# EAGLE board BulkBoard3 (EAGLE 8.5.1), part 1 of 2
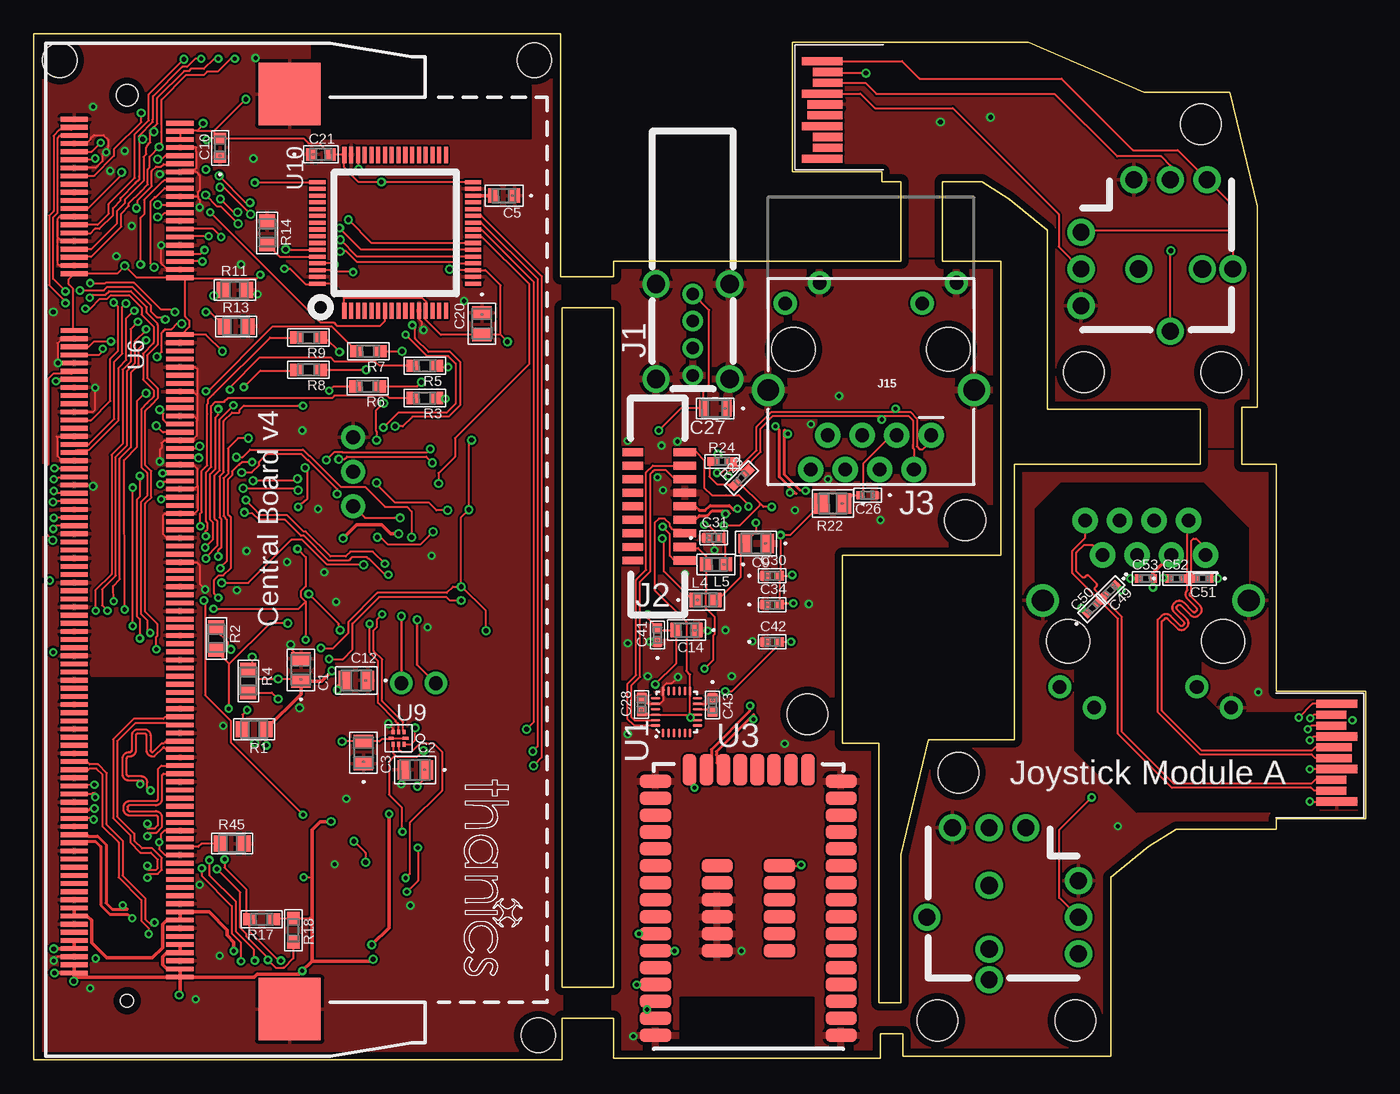
[diagram p0: board, top side]
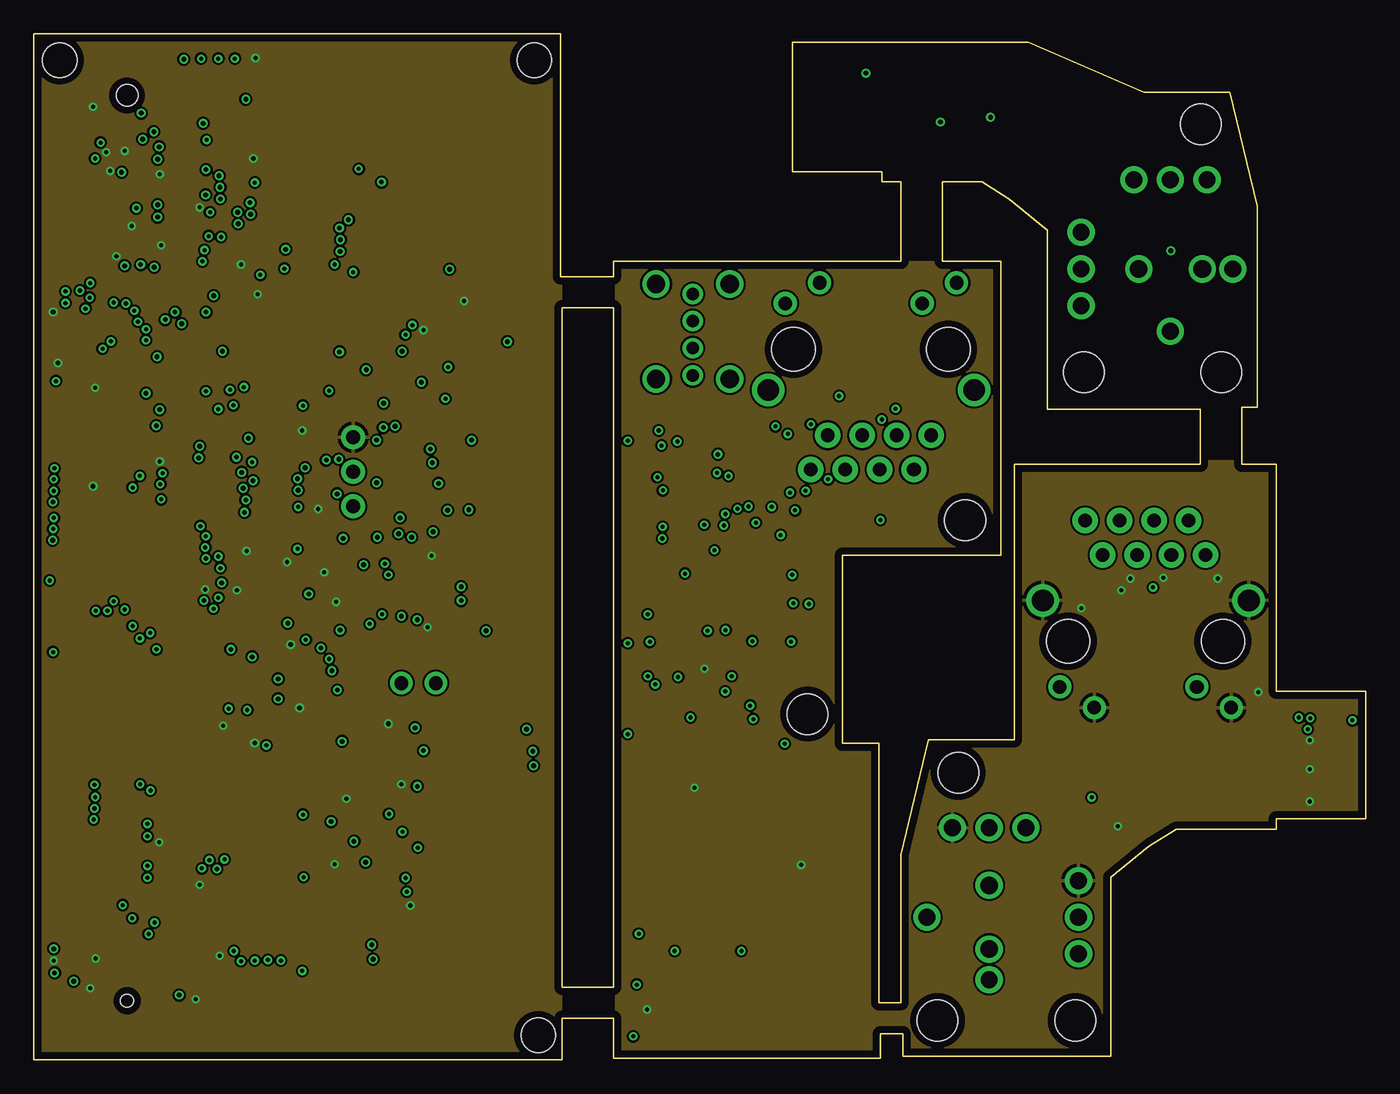
[diagram p1: board, inner layer Route2]
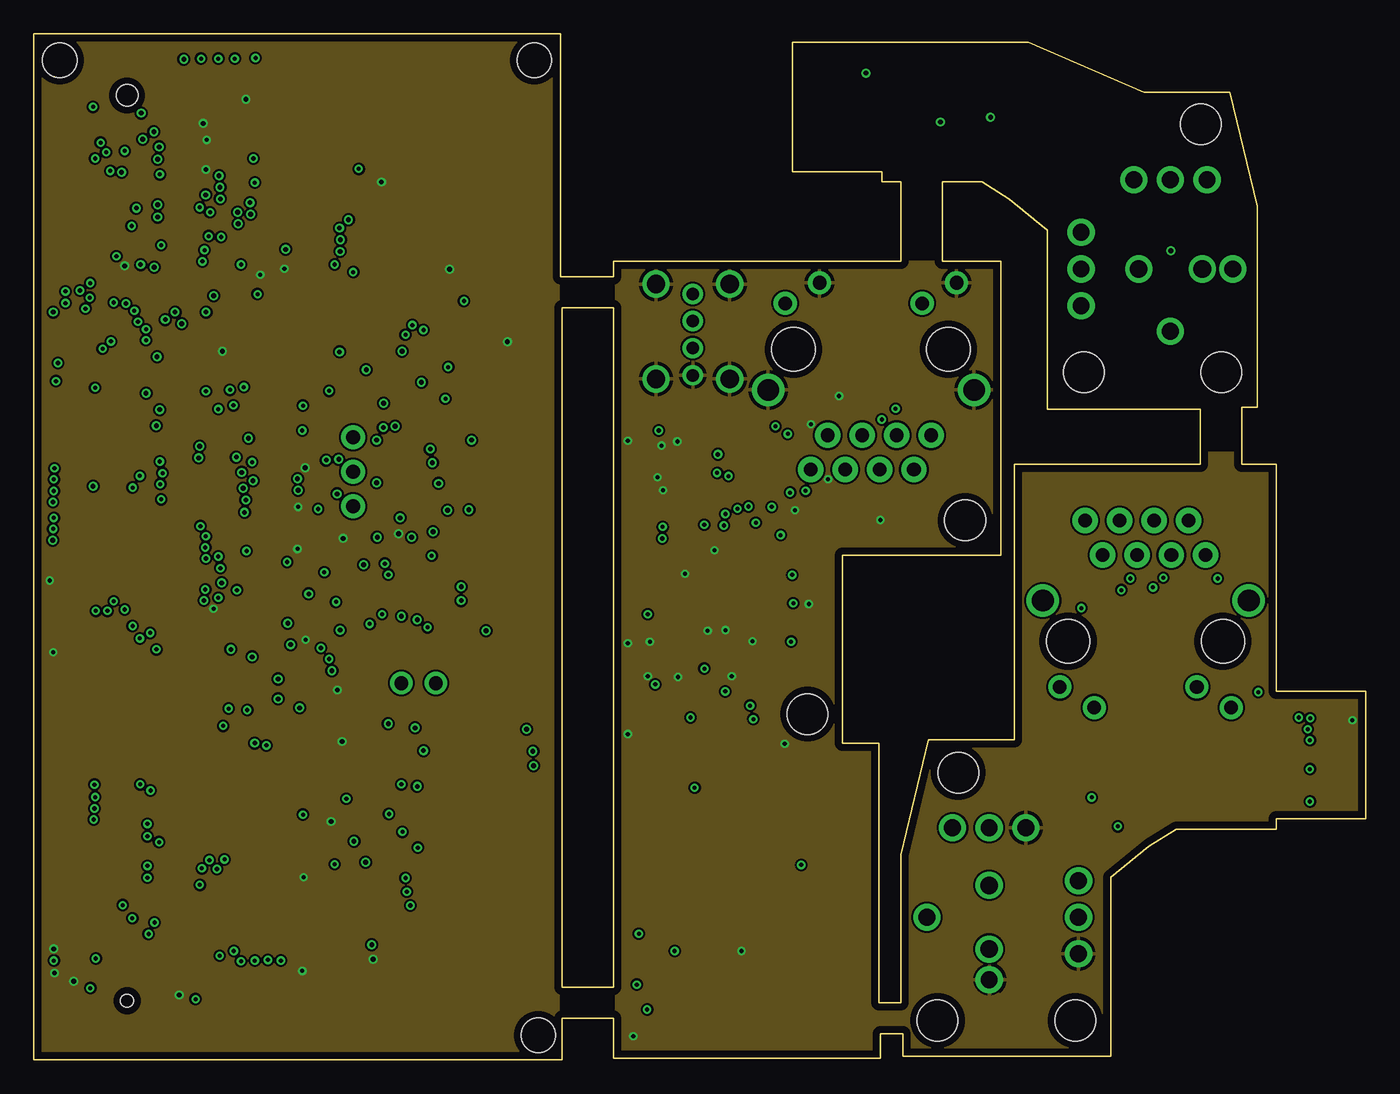
[diagram p2: board, inner layer Route15]
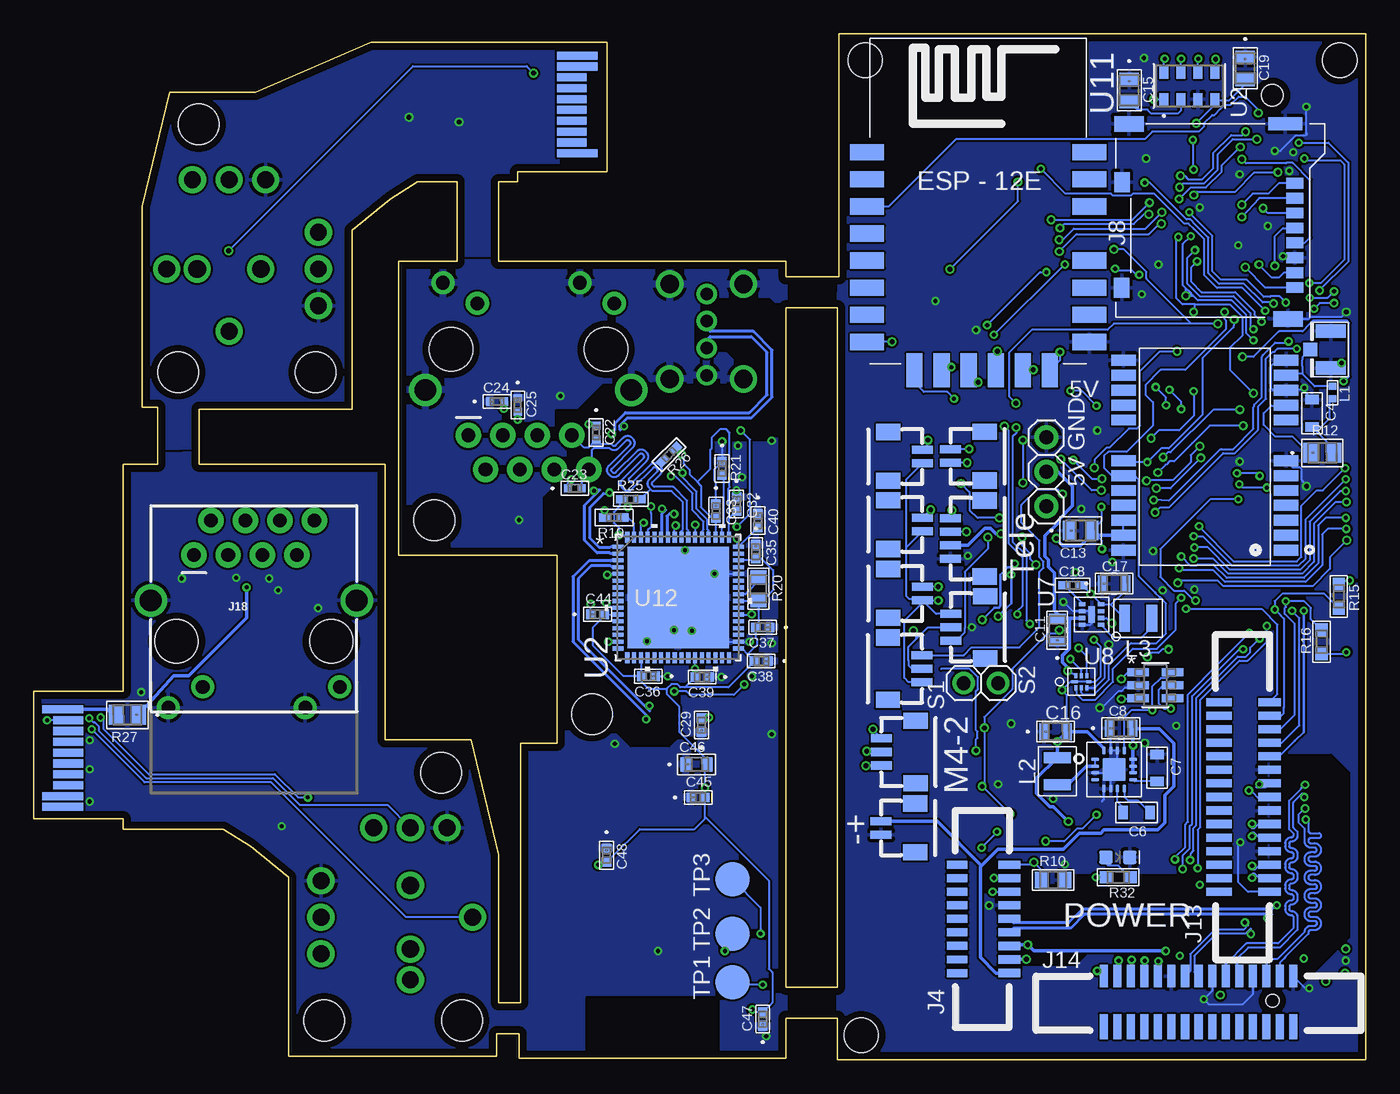
[diagram p3: board, bottom side, seen from below]

Size 98.3 x 75.69 mm. Coordinates in mm from the lower left corner, seen from the top.
Outline: 0,0 38.99,0 38.99,3.05 42.8,3.05 42.8,0.13 62.48,0.13 62.48,1.91 64.14,1.91 64.14,0.25 79.5,0.25 79.5,13.46 82.3,15.75 84.33,17.02 91.69,17.02 91.69,17.78 98.3,17.78 98.3,27.18 91.69,27.18 91.69,43.94 89.15,43.94 89.15,48.13 90.3,48.13 90.3,62.99 88.27,71.37 81.92,71.37 73.41,75.06 56.01,75.06 56.01,65.53 62.61,65.53 62.61,64.77 64.01,64.77 64.01,58.93 42.8,58.93 42.8,57.78 38.86,57.78 38.86,75.69 0,75.69 0,0
Outline: 86.11,48.01 86.11,43.94 72.39,43.94 72.39,23.62 66.04,23.62 64.01,15.11 64.01,4.19 62.36,4.19 62.36,23.37 59.69,23.37 59.69,37.21 71.37,37.21 71.37,58.93 67.06,58.93 67.06,64.77 69.98,64.77 72.01,63.5 74.8,61.21 74.8,48.01 86.11,48.01
Outline: 38.99,5.33 42.8,5.33 42.8,55.5 38.99,55.5 38.99,5.33
Copper layers (1*2*15*16): Top 0.035mm / dielectric 0.2mm / Route2 0.035mm / dielectric 1.2mm / Route15 0.035mm / dielectric 0.2mm / Bottom 0.035mm
Design rules "Elecrow_4-layer_PCB_eagle_rule": minimum track width 6mil, minimum drill 12mil, track to track 6mil, track to pad 6mil, pad to pad 6mil, via to via 8mil, smd to smd 0mil, copper to edge 20mil, drill to drill 10mil, minimum pad ring 6mil, minimum via ring 6mil, stop-mask expansion 0mil, vias tented up to drill 100mil, thermal gap 10mil
Holes 2.54 mm at 37.24,1.8 1.91,73.74 36.93,73.74
Holes 3 mm at 68.74,39.8 57.11,25.5 68.22,21.18 76.86,2.9 66.7,2.9 86.13,69.01 77.5,50.72 87.66,50.72
tRestrict: area 47.7,0.2 to 57.5,4.6
bRestrict: area 47.7,0.2 to 57.5,4.6

## Footprints (pad centres in the part's own frame; a part is rotated, then mirrored left to right if it is on the bottom)
0805 = smd 0.965 x 1.448: 1 -0.826,0; 2 0.826,0
0603_CAPACITOR = smd 0.701 x 1.001: 1 -1.001,0; 2 1.001,0
0603-M = smd 0.813 x 1.067: 1 -0.775,0; 2 0.775,0
G-21 = smd 0.711 x 1.245: 1 -0.851,0; 2 0.851,0
YAG_CC0805 = smd 0.965 x 1.448: 1 -0.826,0; 2 0.826,0
G-188-M = smd 0.813 x 0.914: 1 -0.699,0; 2 0.699,0
CC0402N-M = smd 0.864 x 0.61: 1 -0.635,0; 2 0.635,0
G-155-M = smd 0.559 x 0.61: 1 -0.521,0; 2 0.521,0
0402-M = smd 0.711 x 0.711: 1 -0.508,0; 2 0.508,0
LED-0603 = smd 1 x 1: A -0.877,0; C 0.877,0
JST_SH_2POS = smd 0.6 x 1.55: 1 -1.5,0; 2 -0.5,0 | smd 1.2 x 1.8: P$5 -2.8,2.525; P$6 0.8,2.525
JST_SH_4POS = smd 0.6 x 1.55: 1 -1.5,0; 2 -0.5,0; 3 0.5,0; 4 1.5,0 | smd 1.2 x 1.8: P$5 -2.8,2.525; P$6 2.8,2.525
9POS_FFC_CONNECTOR = smd 0.6 x 1.65: 1 -7.27,-2; 2 -6.27,-2; 3 -5.27,-2; 4 -4.27,-2; 5 -3.27,-2; 6 -2.27,-2; 7 -1.27,-2; 8 -0.27,-2; 9 0.73,-2 | smd 0.584 x 1.524: P$16 -7.27,1.852; P$17 -6.27,1.852; P$18 -5.27,1.852; P$19 -4.27,1.852; P$20 -3.27,1.852; P$21 -2.27,1.852; P$22 -1.27,1.852; P$23 -0.27,1.852; P$24 0.73,1.852
U.FL = smd 2.2 x 1: P$1 0,1.375; P$2 0,-1.375 | smd 1.05 x 1: P$3 1.525,0
MICROSD = smd 0.8 x 1.24: 1 -4.4,0; 2 -3.3,0; 3 -2.2,0; 4 -1.1,0; 5 0,0; 6 1.1,0; 7 2.2,0; 8 3.3,0 | smd 0.95 x 2.5: 9 -8.775,-0.7 | smd 1.15 x 2.2: 10 5.615,-0.5; 11 -8.775,-12.23 | smd 1.5 x 1.15: 12 -4.47,-12.755; 13 3.31,-12.775
JST_SH_3POS = smd 0.6 x 1.55: 1 -1.61,-0.08; 2 -0.61,-0.08; 3 0.39,-0.08 | smd 1.2 x 1.8: P$5 -2.91,2.445; P$6 1.69,2.445
15POS_FFC_CONNECTOR = smd 0.6 x 1.65: 1 -6,-2; 2 -5,-2; 3 -4,-2; 4 -3,-2; 5 -2,-2; 6 -1,-2; 7 0,-2; 8 1,-2; 9 2,-2; 10 3,-2; 11 4,-2; 12 5,-2; 13 6,-2; 14 7,-2; 15 8,-2 | smd 0.6 x 1.85: P$16 -6,1.725; P$17 -5,1.725; P$18 -4,1.725; P$19 -3,1.725; P$20 -2,1.725; P$21 -1,1.725; P$22 0,1.725; P$23 1,1.725; P$24 2,1.725; P$25 3,1.725; P$26 4,1.725; P$27 5,1.725; P$28 6,1.725; P$29 7,1.725; P$30 8,1.725
MAGJACK = drill 1 pad 1.88: 1 -4.445,6.015; 2 -3.175,8.555; 3 -1.905,6.015; 4 -0.635,8.555; 5 0.635,6.015; 6 1.905,8.555; 7 3.175,6.015; 8 4.445,8.555 | drill 1 pad 1.7: 9 -3.785,-3.715; 10 -6.325,-5.235; 11 6.325,-3.715; 12 3.785,-5.235 | drill 1.6 pad 2.184: M1 -7.62,2.67; M2 7.58,2.67 | hole 3.2: -5.715,-0.335; 5.715,-0.335
USB_A_VERTICAL = drill 0.92 pad 1.5: 1 -3,0; 2 -1,0; 3 1,0; 4 3,0 | drill 1.35 pad 2: P$5 -3.73,-2.72; P$6 -3.73,2.72; P$7 3.27,2.72; P$8 3.27,-2.72
1X02 = drill 1.016 pad 1.651: 1 -1.27,0; 2 1.27,0
1X03 = drill 1.016 pad 1.778: 1 -2.54,0; 2 0,0; 3 2.54,0
0402_INDUCTOR = smd 0.525 x 0.55: P$1 -0.463,0; P$2 0.463,0
1008_INDUCTOR = smd 0.8 x 2: P$1 -1,0; P$2 1,0
IND_BLM18_0603-M = smd 0.914 x 1.041: 1 -0.724,0; 2 0.724,0
RC0805N = smd 1.006 x 1.2: 1 -0.853,0; 2 0.853,0
RC0603N-M = smd 0.965 x 0.914: 1 -0.876,0; 2 0.876,0
STA_RNCP0805-M = smd 1.118 x 1.499: 1 -0.826,0; 2 0.826,0
RC0402N-M = smd 0.864 x 0.61: 1 -0.66,0; 2 0.66,0
YAG_R0402-M = smd 0.66 x 0.66: 1 -0.508,0; 2 0.508,0
B2,54 = smd 2.54 x 2.54: TP 0,0
QFN40P300X300X105-25N = smd 0.7 x 0.2: 1 -1.55,1; 2 -1.55,0.6; 3 -1.55,0.2; 4 -1.55,-0.2; 5 -1.55,-0.6; 6 -1.55,-1; 13 1.55,-1; 14 1.55,-0.6; 15 1.55,-0.2; 16 1.55,0.2; 17 1.55,0.6; 18 1.55,1 | smd 0.2 x 0.7: 7 -1,-1.55; 8 -0.6,-1.55; 9 -0.2,-1.55; 10 0.2,-1.55; 11 0.6,-1.55; 12 1,-1.55; 19 1,1.55; 20 0.6,1.55; 21 0.2,1.55; 22 -0.2,1.55; 23 -0.6,1.55; 24 -1,1.55
LGA8-M = smd 0.94 x 0.66: 1 -1.003,1.875; 2 -1.003,0.625; 3 -1.003,-0.625; 4 -1.003,-1.875; 5 1.003,-1.875; 6 1.003,-0.625; 7 1.003,0.625; 8 1.003,1.875
MF06A-M = smd 1.575 x 0.584: 1 -1.27,0.953; 2 -1.27,0; 3 -1.27,-0.953; 4 1.27,-0.953; 5 1.27,0; 6 1.27,0.953
NEO-M8 = smd 1.8 x 0.8: 1 6.4,-7.4; 2 6.4,-6.3; 3 6.4,-5.2; 4 6.4,-4.1; 5 6.4,-3; 6 6.4,-1.9; 7 6.4,-0.8; 8 6.4,2.2; 9 6.4,3.3; 10 6.4,4.4; 11 6.4,5.5; 12 6.4,6.6; 13 -5.6,6.6; 14 -5.6,5.5; 15 -5.6,4.4; 16 -5.6,3.3; 17 -5.6,2.2; 18 -5.6,-0.8; 19 -5.6,-1.9; 20 -5.6,-3; 21 -5.6,-4.1; 22 -5.6,-5.2; 23 -5.6,-6.3; 24 -5.6,-7.4
VQFN16 = smd 0.6 x 0.24: 1 -1.4,0.75; 2 -1.4,0.25; 3 -1.4,-0.25; 4 -1.4,-0.75; 9 1.4,-0.75; 10 1.4,-0.25; 11 1.4,0.25; 12 1.4,0.75 | smd 0.24 x 0.6: 5 -0.75,-1.4; 6 -0.25,-1.4; 7 0.25,-1.4; 8 0.75,-1.4; 13 0.75,1.4; 14 0.25,1.4; 15 -0.25,1.4; 16 -0.75,1.4 | smd 1.68 x 1.68: 17 0,0
SO-DIMM = smd 0.35 x 2: 1 -26.4,-3.9; 2 -26.1,3.9; 3 -25.8,-3.9; 4 -25.5,3.9; 5 -25.2,-3.9; 6 -24.9,3.9; 7 -24.6,-3.9; 8 -24.3,3.9; 9 -24,-3.9; 10 -23.7,3.9; 11 -23.4,-3.9; 12 -23.1,3.9; 13 -22.8,-3.9; 14 -22.5,3.9; 15 -22.2,-3.9; 16 -21.9,3.9; 17 -21.6,-3.9; 18 -21.3,3.9; 19 -21,-3.9; 20 -20.7,3.9; 21 -20.4,-3.9; 22 -20.1,3.9; 23 -19.8,-3.9; 24 -19.5,3.9; 25 -19.2,-3.9; 26 -18.9,3.9; 27 -18.6,-3.9; 28 -18.3,3.9; 29 -18,-3.9; 30 -17.7,3.9; 31 -17.4,-3.9; 32 -17.1,3.9; 33 -16.8,-3.9; 34 -16.5,3.9; 35 -16.2,-3.9; 36 -15.9,3.9; 37 -15.6,-3.9; 38 -15.3,3.9; 39 -15,-3.9; 40 -14.7,3.9; 41 -10.8,-3.9; 42 -10.5,3.9; 43 -10.2,-3.9; 44 -9.9,3.9; 45 -9.6,-3.9; 46 -9.3,3.9; 47 -9,-3.9; 48 -8.7,3.9; 49 -8.4,-3.9; 50 -8.1,3.9; 51 -7.8,-3.9; 52 -7.5,3.9; 53 -7.2,-3.9; 54 -6.9,3.9; 55 -6.6,-3.9; 56 -6.3,3.9; 57 -6,-3.9; 58 -5.7,3.9; 59 -5.4,-3.9; 60 -5.1,3.9; 61 -4.8,-3.9; 62 -4.5,3.9; 63 -4.2,-3.9; 64 -3.9,3.9; 65 -3.6,-3.9; 66 -3.3,3.9; 67 -3,-3.9; 68 -2.7,3.9; 69 -2.4,-3.9; 70 -2.1,3.9; 71 -1.8,-3.9; 72 -1.5,3.9; 73 -1.2,-3.9; 74 -0.9,3.9; 75 -0.6,-3.9; 76 -0.3,3.9; 77 0,-3.9; 78 0.3,3.9; 79 0.6,-3.9; 80 0.9,3.9; 81 1.2,-3.9; 82 1.5,3.9; 83 1.8,-3.9; 84 2.1,3.9; 85 2.4,-3.9; 86 2.7,3.9; 87 3,-3.9; 88 3.3,3.9; 89 3.6,-3.9; 90 3.9,3.9; 91 4.2,-3.9; 92 4.5,3.9; 93 4.8,-3.9; 94 5.1,3.9; 95 5.4,-3.9; 96 5.7,3.9; 97 6,-3.9; 98 6.3,3.9; 99 6.6,-3.9; 100 6.9,3.9; 101 7.2,-3.9; 102 7.5,3.9; 103 7.8,-3.9; 104 8.1,3.9; 105 8.4,-3.9; 106 8.7,3.9; 107 9,-3.9; 108 9.3,3.9; 109 9.6,-3.9; 110 9.9,3.9; 111 10.2,-3.9; 112 10.5,3.9; 113 10.8,-3.9; 114 11.1,3.9; 115 11.4,-3.9; 116 11.7,3.9; 117 12,-3.9; 118 12.3,3.9; 119 12.6,-3.9; 120 12.9,3.9; 121 13.2,-3.9; 122 13.5,3.9; 123 13.8,-3.9; 124 14.1,3.9; 125 14.4,-3.9; 126 14.7,3.9; 127 15,-3.9; 128 15.3,3.9; 129 15.6,-3.9; 130 15.9,3.9; 131 16.2,-3.9; 132 16.5,3.9; 133 16.8,-3.9; 134 17.1,3.9; 135 17.4,-3.9; 136 17.7,3.9; 137 18,-3.9; 138 18.3,3.9; 139 18.6,-3.9; 140 18.9,3.9; 141 19.2,-3.9; 142 19.5,3.9; 143 19.8,-3.9; 144 20.1,3.9; 145 20.4,-3.9; 146 20.7,3.9; 147 21,-3.9; 148 21.3,3.9; 149 21.6,-3.9; 150 21.9,3.9; 151 22.2,-3.9; 152 22.5,3.9; 153 22.8,-3.9; 154 23.1,3.9; 155 23.4,-3.9; 156 23.7,3.9; 157 24,-3.9; 158 24.3,3.9; 159 24.6,-3.9; 160 24.9,3.9; 161 25.2,-3.9; 162 25.5,3.9; 163 25.8,-3.9; 164 26.1,3.9; 165 26.4,-3.9; 166 26.7,3.9; 167 27,-3.9; 168 27.3,3.9; 169 27.6,-3.9; 170 27.9,3.9; 171 28.2,-3.9; 172 28.5,3.9; 173 28.8,-3.9; 174 29.1,3.9; 175 29.4,-3.9; 176 29.7,3.9; 177 30,-3.9; 178 30.3,3.9; 179 30.6,-3.9; 180 30.9,3.9; 181 31.2,-3.9; 182 31.5,3.9; 183 31.8,-3.9; 184 32.1,3.9; 185 32.4,-3.9; 186 32.7,3.9; 187 33,-3.9; 188 33.3,3.9; 189 33.6,-3.9; 190 33.9,3.9; 191 34.2,-3.9; 192 34.5,3.9; 193 34.8,-3.9; 194 35.1,3.9; 195 35.4,-3.9; 196 35.7,3.9; 197 36,-3.9; 198 36.3,3.9; 199 36.6,-3.9; 200 36.9,3.9 | smd 4.6 x 4.6: G1 -28.254,12; G2 39.27,12 | hole 1.6: -28.15,0 | hole 0.965: 38.65,0
MLF(ML)_8PIN = smd 0.5 x 0.3: 1 -0.7,0.75; 2 -0.7,0.25; 3 -0.7,-0.25; 4 -0.7,-0.75; 5 0.7,-0.75; 6 0.7,-0.25; 7 0.7,0.25; 8 0.7,0.75 | smd 0.5 x 1.2: EP 0,0
8-UMLP = smd 0.45 x 0.22: 1 -0.5,0 | smd 0.22 x 0.35: 2 -0.4,-0.45; 3 0,-0.45; 4 0.4,-0.45; 6 0.4,0.45; 7 0,0.45; 8 -0.4,0.45 | smd 0.35 x 0.22: 5 0.55,0
LQFP64 = smd 1.2 x 0.3: 1 -5.75,3.75; 2 -5.75,3.25; 3 -5.75,2.75; 4 -5.75,2.25; 5 -5.75,1.75; 6 -5.75,1.25; 7 -5.75,0.75; 8 -5.75,0.25; 9 -5.75,-0.25; 10 -5.75,-0.75; 11 -5.75,-1.25; 12 -5.75,-1.75; 13 -5.75,-2.25; 14 -5.75,-2.75; 15 -5.75,-3.25; 16 -5.75,-3.75; 33 5.75,-3.75; 34 5.75,-3.25; 35 5.75,-2.75; 36 5.75,-2.25; 37 5.75,-1.75; 38 5.75,-1.25; 39 5.75,-0.75; 40 5.75,-0.25; 41 5.75,0.25; 42 5.75,0.75; 43 5.75,1.25; 44 5.75,1.75; 45 5.75,2.25; 46 5.75,2.75; 47 5.75,3.25; 48 5.75,3.75 | smd 0.3 x 1.2: 17 -3.75,-5.75; 18 -3.25,-5.75; 19 -2.75,-5.75; 20 -2.25,-5.75; 21 -1.75,-5.75; 22 -1.25,-5.75; 23 -0.75,-5.75; 24 -0.25,-5.75; 25 0.25,-5.75; 26 0.75,-5.75; 27 1.25,-5.75; 28 1.75,-5.75; 29 2.25,-5.75; 30 2.75,-5.75; 31 3.25,-5.75; 32 3.75,-5.75; 49 3.75,5.75; 50 3.25,5.75; 51 2.75,5.75; 52 2.25,5.75; 53 1.75,5.75; 54 1.25,5.75; 55 0.75,5.75; 56 0.25,5.75; 57 -0.25,5.75; 58 -0.75,5.75; 59 -1.25,5.75; 60 -1.75,5.75; 61 -2.25,5.75; 62 -2.75,5.75; 63 -3.25,5.75; 64 -3.75,5.75
ESP12E-SMD = smd 2.5 x 1.2: ADC -8.3,3.8; CH_PD -8.3,1.8; GND 8.1,-8.2; GPIO0 8.1,-2.2; GPIO2 8.1,-4.2; GPIO5 8.1,1.8; GPIO12 -8.3,-4.2; GPIO13 -8.3,-6.2; GPIO14 -8.3,-2.2; GPIO15 8.1,-6.2; GPIO16 -8.3,-0.2; RESET -8.3,5.8; RXD0 8.1,3.8; TXD0 8.1,5.8; VCC -8.3,-8.2 | smd 1.2 x 2.5: CS0 -4.8,-10.3; GPIO9 -0.8,-10.3; GPIO10 1.2,-10.3; MISO -2.8,-10.3; MOSI 3.2,-10.3; SCLK 5.2,-10.3
QFN64_9X9MC-M = smd 0.813 x 0.305: 1 -4.445,3.75; 2 -4.445,3.25; 3 -4.445,2.75; 4 -4.445,2.25; 5 -4.445,1.75; 6 -4.445,1.25; 7 -4.445,0.75; 8 -4.445,0.25; 9 -4.445,-0.25; 10 -4.445,-0.75; 11 -4.445,-1.25; 12 -4.445,-1.75; 13 -4.445,-2.25; 14 -4.445,-2.75; 15 -4.445,-3.25; 16 -4.445,-3.75; 33 4.445,-3.75; 34 4.445,-3.25; 35 4.445,-2.75; 36 4.445,-2.25; 37 4.445,-1.75; 38 4.445,-1.25; 39 4.445,-0.75; 40 4.445,-0.25; 41 4.445,0.25; 42 4.445,0.75; 43 4.445,1.25; 44 4.445,1.75; 45 4.445,2.25; 46 4.445,2.75; 47 4.445,3.25; 48 4.445,3.75 | smd 0.305 x 0.813: 17 -3.75,-4.445; 18 -3.25,-4.445; 19 -2.75,-4.445; 20 -2.25,-4.445; 21 -1.75,-4.445; 22 -1.25,-4.445; 23 -0.75,-4.445; 24 -0.25,-4.445; 25 0.25,-4.445; 26 0.75,-4.445; 27 1.25,-4.445; 28 1.75,-4.445; 29 2.25,-4.445; 30 2.75,-4.445; 31 3.25,-4.445; 32 3.75,-4.445; 49 3.75,4.445; 50 3.25,4.445; 51 2.75,4.445; 52 2.25,4.445; 53 1.75,4.445; 54 1.25,4.445; 55 0.75,4.445; 56 0.25,4.445; 57 -0.25,4.445; 58 -0.75,4.445; 59 -1.25,4.445; 60 -1.75,4.445; 61 -2.25,4.445; 62 -2.75,4.445; 63 -3.25,4.445; 64 -3.75,4.445 | smd 7.493 x 7.493: 65 0,0
WGM110A = smd 2.3 x 1: 1 -6.85,0; 2 -6.85,-1.25; 3 -6.85,-2.5; 4 -6.85,-3.75; 5 -6.85,-5; 6 -6.85,-6.25; 7 -6.85,-7.5; 8 -6.85,-8.75; 9 -6.85,-10; 10 -6.85,-11.25; 11 -6.85,-12.5; 12 -6.85,-13.75; 13 -6.85,-15; 14 -6.85,-16.25; 15 -6.85,-17.5; 16 -6.85,-18.75; 25 6.85,-18.75; 26 6.85,-17.5; 27 6.85,-16.25; 28 6.85,-15; 29 6.85,-13.75; 30 6.85,-12.5; 31 6.85,-11.25; 32 6.85,-10; 33 6.85,-8.75; 34 6.85,-7.5; 35 6.85,-6.25; 36 6.85,-5; 37 6.85,-3.75; 38 6.85,-2.5; 39 6.85,-1.25; 40 6.85,0; 41 -2.3,-6.25; 42 2.3,-6.25; 43 -2.3,-7.5; 44 2.3,-7.5; 45 -2.3,-8.75; 46 2.3,-8.75; 47 -2.3,-10; 48 2.3,-10; 49 -2.3,-11.25; 50 2.3,-11.25; 51 -2.3,-12.5; 52 2.3,-12.5 | smd 1 x 2.3: 17 -4.4,-19.6; 18 -3.15,-19.6; 19 -1.9,-19.6; 20 -0.65,-19.6; 21 0.6,-19.6; 22 1.85,-19.6; 23 3.1,-19.6; 24 4.35,-19.6
JOYSTICK = drill 1.25 pad 2: 1 -6.6,2.7; 1' -2.7,-6.6; 2 -6.6,0; 2' 0,-6.6; 3 -6.6,-2.7; 3' 2.7,-6.6; A 0,4.6; B 4.6,0 | drill 1.3 pad 2: P$9 0,2.35; P$10 0,-2.35
EDGE_CONNECTOR_20POS_CONTACTS = smd 0.6 x 3 bottom: 1 -3.4,0; 9 3,0; 10 3.8,0 | smd 0.6 x 2.2 bottom: 2 -2.6,-0.4; 3 -1.8,-0.4; 4 -1,-0.4; 5 -0.2,-0.4; 6 0.6,-0.4; 7 1.4,-0.4; 8 2.2,-0.4 | smd 0.6 x 3: 11 3.4,0; 14 1,0; 17 -1.4,0; 20 -3.8,0 | smd 0.6 x 2.2: 12 2.6,-0.4; 13 1.8,-0.4; 18 -2.2,-0.4; 19 -3,-0.4 | smd 0.6 x 2.6: 15 0.2,-0.2; 16 -0.6,-0.2

## Placement (x,y rotation side)
C1  0.1uF  [0805]  19.71,28.75 90 top
C2  0.1uF  [0805]  28.14,21.39 180 top
C3  0.1uF  [0805]  24.33,22.66 90 top
C4  10nF  [0603_CAPACITOR]  3.96,47.7 270 bottom
C5  4.7uF  [0603-M]  34.7,63.75 180 top
C6  10nF  [0603_CAPACITOR]  16.92,18.24 180 bottom
C7  10nF  [0603_CAPACITOR]  15.39,21.54 270 bottom
C8  10uF  [G-21]  18.06,24.46 0 bottom
C9  1uF  [YAG_CC0805]  53.3,38.09 180 top
C10  2.2uF  [G-188-M]  13.74,67.28 90 top
C11  10uF  [G-21]  22.76,31.7 90 bottom
C12  0.1uF  [0805]  23.8,27.99 180 top
C13  0.1uF  [0805]  21.03,39.04 0 bottom
C14  4.7uF  [0603-M]  48.16,31.7 180 top
C15  1uF  [YAG_CC0805]  17.45,71.53 270 bottom
C16  22uF  [G-21]  22.89,24.21 0 bottom
C17  10uF  [G-21]  18.57,35.13 0 bottom
C18  560pF  [CC0402N-M]  21.62,35 0 bottom
C19  1uF  [YAG_CC0805]  8.89,73.15 270 bottom
C20  0.1uF  [0805]  33.07,54.31 270 top
C21  2.2uF  [G-188-M]  21.18,66.8 0 top
C22  16pF  [G-155-M]  56.79,46.28 270 bottom
C23  16pF  [G-155-M]  58.37,42.16 0 bottom
C24  16pF  [G-155-M]  64.11,48.56 0 bottom
C25  16pF  [G-155-M]  62.59,48.31 270 bottom
C26  22nF  [G-155-M]  61.53,41.66 180 top
C27  22uF  [G-21]  50.29,48.06 180 top
C28  0.1uF  [0402-M]  44.86,26.21 90 top
C29  0.1uF  [0402-M]  49.02,24.69 90 bottom
C30  0.1uF  [0402-M]  54.51,35.71 0 top
C31  0.1uF  [0402-M]  50.19,38.51 0 top
C32  0.1uF  [0402-M]  46.43,41 270 bottom
C33  0.1uF  [0402-M]  47.96,40.49 270 bottom
C34  0.1uF  [0402-M]  54.51,33.58 0 top
C35  0.1uF  [0402-M]  45.01,37.49 270 bottom
C36  0.1uF  [0402-M]  52.93,28.3 180 bottom
C37  0.1uF  [0402-M]  44.5,31.9 180 bottom
C38  0.1uF  [0402-M]  44.6,29.41 180 bottom
C39  0.1uF  [0402-M]  48.97,28.24 180 bottom
C40  0.1uF  [0402-M]  44.86,39.78 270 bottom
C41  0.1uF  [0402-M]  46.02,31.34 90 top
C42  0.1uF  [0402-M]  54.51,30.84 0 top
C43  0.1uF  [0402-M]  50.09,26.16 270 top
C44  0.1uF  [0402-M]  56.69,32.87 0 bottom
C45  0.1uF  [0402-M]  49.28,19.35 0 bottom
C46  4.7uF  [0603-M]  49.38,21.79 0 bottom
C47  0.1uF  [0402-M]  44.5,3 90 bottom
C48  0.1uF  [0402-M]  56.03,15.09 270 bottom
C49  16pF  [G-155-M]  79.45,34.65 225 top
C50  16pF  [G-155-M]  78.13,33.32 45 top
C51  16pF  [G-155-M]  86.26,35.51 180 top
C52  16pF  [G-155-M]  84.33,35.51 0 top
C53  22nF  [G-155-M]  82.08,35.51 0 top
D1  GREEN  [LED-0603]  18.29,14.94 0 bottom
J1  [JST_SH_2POS]  32.72,45.52 90 bottom
J2  [JST_SH_2POS]  32.72,40.49 90 bottom
J3  [JST_SH_4POS]  30.63,38.46 270 bottom
J4  [9POS_FFC_CONNECTOR]  28.3,13.67 90 bottom
J5  U.FL  [U.FL]  2.57,52.4 180 bottom
J6  [JST_SH_2POS]  35.76,16.1 270 bottom
J7  [JST_SH_2POS]  32.72,35.41 90 bottom
J8  MICROSD  [MICROSD]  5.23,60.27 270 bottom
J9  [JST_SH_2POS]  30.63,43.54 270 bottom
J10  [JST_SH_3POS]  30.53,31.29 270 bottom
J11  [JST_SH_3POS]  32.82,29.46 90 bottom
J12  [JST_SH_3POS]  35.66,22.1 270 bottom
J13  [15POS_FFC_CONNECTOR]  9.09,18.39 90 bottom
J14  [15POS_FFC_CONNECTOR]  11.33,4.17 180 bottom
J15  MAGJACK  [MAGJACK]  61.78,52.09 180 top
J16  [USB_A_VERTICAL]  48.64,53.5 270 top
J17  [9POS_FFC_CONNECTOR]  46.05,44.1 90 top
J18  MAGJACK  [MAGJACK]  82.05,31.22 0 bottom
JP1  [1X02]  28.4,27.79 0 bottom
JP2  [1X03]  23.57,43.38 90 bottom
L1  27 nH  [0402_INDUCTOR]  2.44,49.23 270 bottom
L2  470nH  [1008_INDUCTOR]  22.76,21.29 90 bottom
L3  470nH  [1008_INDUCTOR]  16.79,32.59 180 bottom
L4  FB  [IND_BLM18_0603-M]  49.57,33.92 0 top
L5  FB  [IND_BLM18_0603-M]  50.34,36.55 180 top
R1  10k  [RC0805N]  16.26,24.38 180 top
R2  10k  [RC0805N]  13.46,31.09 270 top
R3  20R  [RC0603N-M]  28.85,48.82 180 top
R4  10k  [RC0805N]  15.82,27.94 270 top
R5  20R  [RC0603N-M]  28.85,51.21 180 top
R6  20R  [RC0603N-M]  24.64,49.68 180 top
R7  20R  [RC0603N-M]  24.69,52.27 180 top
R8  20R  [RC0603N-M]  20.27,50.9 180 top
R9  20R  [RC0603N-M]  20.27,53.29 180 top
R10  10k  [RC0805N]  23.06,13.26 0 bottom
R11  10k  [RC0805N]  14.83,56.79 0 top
R12  10  [STA_RNCP0805-M]  3.2,44.78 0 bottom
R13  10k  [RC0805N]  14.94,54.1 0 top
R14  10k  [RC0805N]  17.22,61.01 270 top
R15  1k  [RC0603N-M]  1.98,34.19 270 bottom
R16  1k  [RC0603N-M]  3.25,30.84 90 bottom
R17  1k  [RC0603N-M]  16.81,10.36 180 top
R18  1k  [RC0603N-M]  19.15,9.55 270 top
R19  12k  [RC0402N-M]  55.48,40.01 180 bottom
R20  10k  [RC0805N]  44.82,34.76 270 bottom
R21  12.4k  [YAG_R0402-M]  47.5,43.64 270 bottom
R22  10R  [STA_RNCP0805-M]  58.98,41.05 180 top
R23  49R9  [RC0402N-M]  52.22,42.93 45 top
R24  49R9  [RC0402N-M]  50.8,44.15 0 top
R25  49R9  [RC0402N-M]  54.25,41.35 0 bottom
R26  49R9  [RC0402N-M]  51.41,44.65 225 bottom
R27  10R  [STA_RNCP0805-M]  91.39,25.45 180 bottom
R32  20R  [RC0603N-M]  18.26,13.46 180 bottom
R45  10k  [RC0805N]  14.63,15.95 0 top
TP1  TPB2,54  [B2,54]  46.74,5.7 90 bottom
TP2  TPB2,54  [B2,54]  46.74,9.3 90 bottom
TP3  TPB2,54  [B2,54]  46.74,13.3 90 bottom
U1  [QFN40P300X300X105-25N]  47.44,25.66 90 top
U2  [LGA8-M]  13,71.86 90 bottom
U3  LM3880MF-1AA/NOPBMF06A-M  [MF06A-M]  15.52,27.64 0 bottom
U4  NEO-M8  [NEO-M8]  12.27,45 0 bottom
U5  TPS6209  [VQFN16]  18.57,21.41 0 bottom
U6  [SO-DIMM]  6.88,43 270 top
U7  MIC23050  [MLF(ML)_8PIN]  20.22,32.84 180 bottom
U8  [8-UMLP]  20.98,27.89 0 bottom
U9  [8-UMLP]  26.92,23.72 180 top
U10  [LQFP64]  26.67,61.01 90 top
U11  [ESP12E-SMD]  28.5,61.16 0 bottom
U12  [QFN64_9X9MC-M]  50.74,34.1 0 bottom
U13  WGM110A  [WGM110A]  52.74,1.8 180 top
U$1  JOYSTICK"  [JOYSTICK]  70.51,10.52 180 top
U$2  EDGE_CONNECTOR_20POS_CONTACTS  [EDGE_CONNECTOR_20POS_CONTACTS]  96.16,22.45 270 top
U$3  JOYSTICK"  [JOYSTICK]  83.9,58.34 270 top
U$4  EDGE_CONNECTOR_20POS_CONTACTS  [EDGE_CONNECTOR_20POS_CONTACTS]  58.19,70.28 90 top

## Library data of the parts
C1-C3 C12 C13 C20 = 0.1uF X7R Ceramic Capacitor; COPYRIGHT: Copyright C 2015 Accelerated Designs. All rights reserved; MANUFACTURER_PART_NUMBER: 08055C104KAT2A; VENDOR: Vendor
C4 C6 C7 J1-J4 J6-J14 J16 J17 L1-L3 U5 U7-U10 U13 U$1-U$4 = thanics_robotics
C5 C14 C46 = 4.7uF-capacitor; MANUFACTURER_PART_NUMBER: 06036D475KAT2A; VENDOR: AVX Corporation
C8 C11 C17 = 10uF X5R Ceramic Capacitor; COPYRIGHT: Copyright C 2015 Accelerated Designs. All rights reserved; MANUFACTURER_PART_NUMBER: GRM21BR60J106ME19L; VENDOR: Vendor
C9 C15 C19 = 1uF X7R Ceramic Capacitor; COPYRIGHT: Copyright C 2015 Accelerated Designs. All rights reserved; MANUFACTURER_PART_NUMBER: CC0805KKX7R7BB105; VENDOR: Vendor
C10 C21 = 2.2uF X5R Capacitor; COPYRIGHT: Copyright C 2015 Accelerated Designs. All rights reserved; MANUFACTURER_PART_NUMBER: GRM188R61C225KE15J; VENDOR: Vendor
C16 C27 = 22uF X5R Ceramic Capacitor; COPYRIGHT: Copyright C 2015 Accelerated Designs. All rights reserved; MANUFACTURER_PART_NUMBER: GRM21BR60J226ME39L; VENDOR: Vendor
C18 = 560pF-capacitor; MANUFACTURER_PART_NUMBER: CC0402KRX7R9BB561; VENDOR: Yageo
C22-C25 C49-C52 = 16pF-capacitor; MANUFACTURER_PART_NUMBER: GRM1555C1H160JA01D; VENDOR: Murata
C26 C53 = 22nF-capacitor; MANUFACTURER_PART_NUMBER: GRM155R71H223KA12D; VENDOR: Murata
C28-C45 C47 C48 = 0.1uF-capacitor-0402; MANUFACTURER_PART_NUMBER: 0402ZD104KAT2A; VENDOR: AVX Corporation
D1 = SparkFun-LED; PROD_ID: DIO-00821
J5 = SparkFun-Connectors; PROD_ID: CONN-09193; SF_ID: WRL-09144
J15 J18 = SparkFun-Connectors; PROD_ID: CONN-09556; SF_ID: PRT-08534
JP1 JP2 = pinhead
L4 L5 = 600ohm-fb; MANUFACTURER_PART_NUMBER: BLM18AG601SN1D; VENDOR: MURATA
R1 R2 R4 R10 R11 R13 R14 R20 R45 = 10k-resistor; CASE: 0805 2012 metric; COMPOSITION: Thin Film; COPYRIGHT: Copyright C 2015 Accelerated Designs. All rights reserved; DATASHEET: httpindustrial.panasonic.comwwwcgijvcr13pz.cgi?E+PZ+3+AOA0026+ERA6AEB103V+7+WW; DIGIKEYPARTNUMBER: P10KDATRND; HEIGHT: 0.024" 0.60mm; LEADSTYLE: Surface Mount SMD SMT; MANUFACTURER_PART_NUMBER: ERA6AEB103V; NUMBEROFTERMINATIONS: 2; PACKAGECASE: 0805 2012 Metric; PACKAGING: Tape &amp Reel TR; POWERWATTS: 0.125W 18W; QUANTITY_AVAILABLE: 225000; RESISTANCEINOHMS: 10.0K; RESISTANCEOHMS: 10K; SIZEDIMENSION: 0.079" L x 0.049" W 2.00mm x 1.25mm; TEMPERATURECOEFFICIENT: 25ppm°C; TOLERANCE: 0.1%; VENDOR: Panasonic; VOLTAGEWORKING: 100V
R3 R5-R9 R32 = 20-resistor; MANUFACTURER_PART_NUMBER: RC0603JR0720RL; VENDOR: Yageo
R12 R22 R27 = 10-resistor; COPYRIGHT: Copyright C 2015 Accelerated Designs. All rights reserved; MANUFACTURER_PART_NUMBER: RNCP0805FTD10R0; VENDOR: Vendor
R15-R18 = 1k-resistor; CASE: 0603 1608 metric; COMPOSITION: Thick Film; COPYRIGHT: Copyright C 2015 Accelerated Designs. All rights reserved; DATASHEET: httpwww.yageo.comdocumentsrecentPYuRC0603_51_RoHS_L_4.pdf; DESCRIPTION: RES 1.0K OHM 110W 5% 0603 SMD; DIGIKEYPARTNUMBER: 3111.0KGRTRND; HEIGHT: 0.022" 0.55mm; LEADSTYLE: Surface Mount SMD SMT; MANUFACTURER_PART_NUMBER: RC0603JR071KL; NEWARKPARTNUMBER: 14M7231; NUMBEROFTERMINATIONS: 2; PACKAGECASE: 0603 1608 Metric; PACKAGING: Tape &amp Reel TR; POWERWATTS: 0.1W 110W; QUANTITY_AVAILABLE: 0; RESISTANCEINOHMS: 1.00K; RESISTANCEOHMS: 1K; SIZEDIMENSION: 0.063" L x 0.031" W 1.60mm x 0.80mm; TEMPERATURECOEFFICIENT: 100ppm°C; TOLERANCE: 5%; VENDOR: Yageo; VOLTAGEWORKING: 50V
R19 = 12k-resistor; MANUFACTURER_PART_NUMBER: RC0402FR0712KL; VENDOR: Yageo
R21 = 12.4k-resistor; MANUFACTURER_PART_NUMBER: RC0402FR0712K4L; VENDOR: Yageo
R23-R26 = 49.9-resistor; MANUFACTURER_PART_NUMBER: RC0402FR0749K9L; VENDOR: Yageo
TP1-TP3 = testpad
U1 = ICM-20948-mpu
U2 = mpl115a1-barometer; MANUFACTURER_PART_NUMBER: mpl115a1; VENDOR: Freescale
U3 = LM3880MF; MANUFACTURER_PART_NUMBER: lm3880mf1aaNOPB; VENDOR: National Semiconductor
U4 = ubloxLib
U6 = raspberrypi_cm
U11 = esp8266modules
U12 = lan9512; MANUFACTURER_PART_NUMBER: LAN9512JZX; VENDOR: MICROCHIP

## Nets
1.8V: C2.1 C17.2 C18.2 J4.3 L3.P$2 U6.183 U6.184 U6.185 U6.186 U7.4 U9.8
1.8V1: C28.1 C29.2 J17.3 U1.8 U1.9 U1.13 U1.22
3.3V_A: C30.2 C31.2 C32.2 C33.2 C34.2 L5.1 R22.2 R23.1 R24.1 R25.1 R26.1 U12.5 U12.10 U12.49 U12.51 U12.54 U12.57 U12.64
3.3V_A1: R27.2 U$2.1
+3V1: C35.2 C36.2 C37.2 C38.2 C39.2 C44.2 C45.2 C46.2 C47.2 C48.2 J17.2 L5.2 R20.2 U12.11 U12.12 U12.19 U12.27 U12.33 U12.39 U12.40 U12.46 U13.24 U13.38 U13.39 U13.51
+3V2: U$1.1 U$1.1' U$1.A U$2.2
+3V3: C3.2 C10.2 C12.2 C13.2 C16.2 C19.2 C20.2 C21.2 J3.3 J4.2 J8.4 J13.15 J14.15 L2.P$2 R15.1 R16.1 R17.1 R18.1 R32.2 U2.1 U2.4 U4.22 U4.23 U5.16 U6.4 U6.6 U6.39 U6.40 U6.41 U6.42 U6.191 U6.192 U6.193 U6.194 U6.197 U6.198 U6.199 U6.200 U8.1 U8.5 U9.1 U9.5 U10.1 U10.13 U10.19 U10.32 U10.48 U10.64 U11.VCC
+3V4: U$3.1 U$3.1' U$3.A U$4.11
+5V: C1.1 C8.2 C11.2 J4.1 J6.1 JP2.2 R1.1 R2.1 R4.1 U3.1 U5.10 U5.11 U5.12 U7.7 U8.8
+5V1: C27.2 J16.1 J17.1
C0_C_N: J13.8 U6.144
C0_C_P: J13.9 U6.142
C0_D0_N: J13.2 U6.138
C0_D0_P: J13.3 U6.136
C0_D1_N: J13.5 U6.150
C0_D1_P: J13.6 U6.148
C0_IO0: J13.11 U6.36
C0_IO1: J13.12 U6.34
C1_C_N: J14.8 U6.149
C1_C_P: J14.9 U6.147
C1_D0_N: J14.2 U6.161
C1_D0_P: J14.3 U6.159
C1_D1_N: J14.5 U6.155
C1_D1_P: J14.6 U6.153
C1_IO0: J14.11 U6.78
C1_IO1: J14.12 U6.76
EMMC_DISABLE_N: U6.2
GND: C1.2 C2.2 C3.1 C4.1 C5.1 C7.1 C8.1 C10.1 C11.1 C12.1 C13.1 C15.1 C16.1 C17.1 C19.1 C20.1 C21.1 D1.C J3.4 J4.6 J5.P$1 J5.P$2 J6.2 J8.6 J8.9 J8.10 J8.11 J8.12 J8.13 J13.1 J13.4 J13.7 J13.10 J14.1 J14.4 J14.7 J14.10 JP2.3 R10.2 R11.2 R13.2 R14.1 R45.2 U2.3 U3.2 U4.7 U4.10 U4.12 U4.13 U4.24 U5.3 U5.5 U5.6 U5.14 U5.15 U5.17 U6.1 U6.7 U6.8 U6.13 U6.14 U6.19 U6.20 U6.25 U6.26 U6.31 U6.32 U6.37 U6.38 U6.43 U6.44 U6.49 U6.50 U6.55 U6.56 U6.61 U6.62 U6.67 U6.68 U6.73 U6.74 U6.79 U6.80 U6.85 U6.86 U6.91 U6.92 U6.97 U6.98 U6.103 U6.104 U6.109 U6.110 U6.115 U6.116 U6.121 U6.122 U6.127 U6.133 U6.134 U6.139 U6.140 U6.145 U6.146 U6.151 U6.152 U6.157 U6.163 U6.164 U6.169 U6.170 U6.181 U6.182 U6.187 U6.188 U6.195 U6.196 U6.G1 U6.G2 U7.6 U7.8 U7.EP U8.4 U9.4 U10.12 U10.18 U10.31 U10.47 U10.63 U11.GND
GND1: C9.1 C14.1 C22.1 C23.1 C24.1 C25.1 C26.1 C27.1 C28.2 C29.1 C30.1 C31.1 C32.1 C33.1 C34.1 C35.1 C36.1 C37.1 C38.1 C39.1 C40.1 C41.1 C42.1 C43.1 C44.1 C45.1 C46.1 C47.1 C48.1 J15.10 J15.12 J15.M1 J15.M2 J16.4 J16.P$5 J16.P$6 J16.P$7 J16.P$8 J17.6 R19.2 R21.1 U1.11 U1.18 U1.20 U12.34 U12.44 U12.65 U13.1 U13.16 U13.25 U13.40 U13.42 U13.44 U13.46 U13.48
GND2: C49.1 C50.1 C51.1 C52.1 C53.1 J18.10 J18.12 J18.M1 J18.M2 U$1.3 U$1.3' U$2.11 U$2.14 U$2.17
GND3: U$3.3 U$3.3' U$4.15
GPCLK: J17.9 U12.61
GPCLK1: J4.9 R10.1 U6.82
I2C_MPU_SCL: U9.3 U10.61
I2C_MPU_SDA: U9.2 U10.62
I2C_SCL: U4.19 U6.11 U8.3
I2C_SCL_1V8: J4.7 U9.6
I2C_SCL_5V: J1.2 J2.2 J7.2 J10.2 J11.2 U8.6
I2C_SDA: U4.18 U6.9 U8.2
I2C_SDA_1V8: J4.8 U9.7
I2C_SDA_5V: J1.1 J2.1 J7.1 J10.1 J11.1 U8.7
ID_SD: U6.15 U11.CH_PD
INT_A: J10.3 U6.64
INT_B: J11.3 U6.66
J2_SW: U$1.B U$2.18
J2_SW1: U$3.B U$4.12
MOTOR1: JP2.1 U10.24
MOTOR2: J12.1 U10.25
MOTOR3: J12.2 U10.26
MOTOR4: J12.3 U10.27
N$1: J5.P$3 L1.P$1 U4.11
N$2: C6.2 U5.7
N$3: C6.1 U5.8
N$4: D1.A R32.1
N$5: R1.2 U3.6 U5.13
N$6: R2.2 U3.5 U7.2
N$7: R3.1 U11.CS0
N$8: R5.1 U11.MISO
N$9: R6.1 U11.GPIO9
N$10: R7.1 U11.GPIO10
N$11: C5.2 U10.30
N$12: C15.2 U2.2
N$13: R12.1 U4.9
N$14: R8.1 U11.MOSI
N$15: R9.1 U11.SCLK
N$16: R14.2 U10.60
N$19: C43.2 U1.10
N$20: R20.1 U12.41
N$21: R19.1 U12.63
N$22: TP1.TP U13.37
N$23: TP2.TP U13.35
N$24: TP3.TP U13.34
N$25: J15.11
N$26: C4.2 L1.P$2 R12.2
N$27: J15.9
N$28: C40.2 L4.1 U12.48
N$29: C7.2 U5.9
N$30: L2.P$1 U5.1 U5.2
N$31: C9.2 L4.2 U12.62
N$32: L3.P$1 U7.1
N$33: R21.2 U12.50
N$34: C14.2 C41.2 C42.2 U12.15 U12.38
N$35: C26.2 J15.3 R22.1
N$37: C53.2 J18.3 R27.1
N$48: C18.1 U7.5
N$53: R45.1 U6.168
NRST: U6.63 U10.7
POWER_SEQ_EN: R4.2 U3.3
RX_N: C25.2 J15.2 R23.2 U12.53
RX_N1: C52.2 J18.2 U$2.15
RX_P: C24.2 J15.1 R24.2 U12.52
RX_P1: C51.2 J18.1 U$2.16
SCL: J17.7 U1.23
SCL0: J13.13 R11.1 R16.2 U6.30
SCL1: J14.13 R18.2 U6.5
SD_CLK: R9.2 U6.75
SD_CMD: R3.2 U6.77
SD_D0: R5.2 U6.81
SD_D1: R8.2 U6.83
SD_D2: R6.2 U6.87
SD_D3: R7.2 U6.89
SDA: J17.8 U1.24
SDA0: J13.14 R13.1 R15.2 U6.28
SDA1: J14.14 R17.2 U6.3
SDX_CLK: J8.5 U6.10
SDX_CMD: J8.3 U6.12
SDX_D0: J8.7 U6.16
SDX_D1: J8.8 U6.18
SDX_D2: J8.1 U6.22
SDX_D3: J8.2 U6.24
SERVO1: JP1.1 U6.45
SERVO2: JP1.2 U6.47
SPI_CS0: U2.5 U6.27
SPI_CS1: U6.23 U10.20
SPI_MISO: U2.6 U6.29 U10.22
SPI_MOSI: U2.7 U6.33 U10.23
SPI_SCLK: U2.8 U6.35 U10.21
SWCLK: U6.69 U10.49
SWDIO: U6.71 U10.46
TX_N: C23.2 J15.8 R25.2 U12.56
TX_N1: C50.2 J18.8 U$2.12
TX_P: C22.2 J15.7 R26.2 U12.55
TX_P1: C49.2 J18.7 U$2.13
UART2_RX: J9.2 U6.72
UART2_TX: J9.1 U6.70
USART1_RX: J3.1 U6.53 U10.59
USART1_TX: J3.2 U6.51
USB_D2_N: J16.2 U12.1
USB_D2_P: J16.3 U12.2
USB_D3_N: U12.3 U13.22
USB_D3_P: U12.4 U13.23
USB_D_N: J4.4 U6.167
USB_D_N1: J17.4 U12.58
USB_D_P: J4.5 U6.165
USB_D_P1: J17.5 U12.59
VRX: U$1.2 U$2.20
VRX1: U$3.2 U$4.13
VRY: U$1.2' U$2.19
VRY1: U$3.2' U$4.14

## Tracks (layer width: path | path; a pad name or v marks a point on that pad's centre or on a via)
1.8V  (via drill 0.3, 0.35)
  Top 0.152: 10.75,10.87 U6.184 | C2.1 28.97,20.83 v28.3,20.17 | v22.61,31.7 22.5,32.16 v20.29,34.37 | U9.8 27.84,23.27 28.14,23.58 v28.14,24.49
  Top 0.254: v26.21,18.14 26.21,9.75 v24.94,8.48 | U6.183 U6.185 3.95,10.6 4.26,10.29 4.26,8.64 5.38,7.52 8.74,7.52 9.5,8.28 9.5,9.99 9.81,10.3 U6.186 U6.184 12.92,10.9 14.26,9.56 14.26,9.17 14.76,8.68 v14.76,8.03
  Bottom 0.152: L3.P$2 17.8,32.59 18.8,33.58 | 18.8,33.58 19.5,33.58 U7.4 v20.29,34.37 20.93,35 C18.2 | 18.8,33.58 17.72,34.66 C17.2 17.69,35.15 | v26.21,18.14 26.27,18.14 v28.3,20.17 28.14,20.33 v28.14,24.49 28.14,25.28 26.07,27.35 26.07,28.84 23.48,31.43 22.87,31.43 v22.61,31.7
  Bottom 0.254: J4.3 26.21,8.48 v24.94,8.48 24.49,8.03 v14.76,8.03
1.8V1  (via drill 0.3)
  Top 0.152: v48.46,25.25 48.65,25.06 U1.8 | U1.9 48.68,25.46 v48.46,25.25 | 48.41,25.45 48.41,26.8 48.44,26.83 U1.13 48.44,28.42 48.16,28.7 48.16,32.31 45.82,34.65 45.82,39.62 46.13,39.93 46.55,39.93 46.94,39.54 46.94,39.37 47.19,39.12 47.77,39.12 J17.3 | 48.41,25.45 48.41,25.3 v48.46,25.25 | C28.1 45.06,25.7 45.31,25.45 U1.22 48.4,25.46 48.41,25.45
  Bottom 0.152: C29.2 48.97,25.25 v48.46,25.25
3.3V_A  (via drill 0.3, 0.35)
  Top 0.152: C31.2 50.6,38.5 51.06,38.04 L5.1 | C31.2 50.93,38.79 v50.93,39.42 52.1,39.42 53.59,40.91 53.59,41.05 | C30.2 55.12,35.81 v55.12,38.71 55.82,38.71 R22.2 | C30.2 C34.2 55.12,33.68 v56.05,33.68 | C31.2 50.27,38.94 50.27,38.96 49.75,39.47 v49.48,39.47 | v54.46,40.79 53.85,40.79 53.59,41.05 | 53.59,41.05 52.27,42.37 51.76,42.37 R23.1 50.42,42.46 49.86,43.03 49.86,43.86 R24.1 50.14,44.32 v50.48,44.66 | C30.2 55.91,35.71 v55.97,35.77
  Bottom 0.152: U12.51 47.95,38.58 C33.2 48.03,40.06 48.35,40.06 49.07,40.78 49.07,42.37 49.33,42.63 | U12.54 49.49,39.46 v49.48,39.47 | U12.57 50.99,39.35 v50.93,39.42 | U12.64 54.66,38.71 v55.12,38.71 55.12,39.24 55.48,39.61 55.48,40.41 55.07,40.82 R25.1 54.91,41.25 v54.46,40.79 | 49.33,42.63 49.9,43.2 49.9,43.52 50.31,43.93 50.31,44.49 v50.48,44.66 R26.1 | v56.05,33.68 55.83,33.45 55.73,33.45 55.63,33.35 U12.10 | U12.49 46.99,39.92 46.94,39.98 | 46.94,39.98 C32.2 | 46.94,39.98 46.94,40.98 47.02,41.05 47.02,42.18 46.94,42.26 46.94,46.28 47.19,46.53 47.65,46.53 48.26,45.92 48.26,45.13 48.36,45.03 48.36,43.6 49.33,42.63 | U12.5 55.9,35.85 v55.97,35.77
3.3V_A1
  Bottom 0.254: U$2.1 92.92,25.85 R27.2
+3V1  (via drill 0.3)
  Top 0.152: J17.2 48.14,37.74 49.02,37.74 49.61,37.15 L5.2 49.61,34.55 49.6,34.54 49.6,33.31 50.27,32.65 50.27,31.43 50.15,31.31 50.15,29.51 v49.49,28.85 | U13.24 48.77,21.02 v48.77,20.07 | U13.51 56.57,14.3 v56.64,14.38 | U13.39 45.26,3.68 v45.26,3.71 45.3,3.71 U13.38
  Bottom 0.152: U12.19 53.49,28.35 C36.2 | U12.33 46.04,30.35 45.59,29.9 | 45.59,29.9 C38.2 47.04,27.48 50.24,27.48 | U12.39 U12.40 44.87,33.85 R20.2 44.82,33.83 | 45.59,29.9 45.59,29.95 44.93,30.61 44.93,31.06 45.01,31.13 C37.2 44.78,32.13 44.78,33.09 44.82,33.12 44.82,33.83 | U12.27 v49.49,28.85 49.49,28.26 C39.2 50.24,27.48 | C36.2 53.44,27.89 52.93,27.38 51.56,27.38 | C36.2 54.76,28.3 57.05,30.58 57.05,31.89 56.08,32.86 C44.2 55.22,32.82 U12.11 U12.12 | U12.46 45.14,36.85 C35.2 44.6,36.98 43.74,36.12 43.74,34.65 44.3,34.09 44.56,34.09 44.82,33.83 | v56.64,14.38 56.24,14.38 C48.2 55.6,15.01 55.58,15.01 53.58,17.02 49.53,17.02 48.77,17.78 48.77,17.93 | v45.26,3.71 45.06,3.5 C47.2 43.79,4.22 43.79,6.45 44.04,6.71 44.04,13.21 48.77,17.93 | 48.77,17.93 C45.2 v48.77,20.07 48.77,21.63 C46.2 48.6,22.14 50.65,24.18 50.65,26.04 51.56,26.96 51.56,27.38 | 50.24,27.48 50.58,27.48 50.81,27.71 51.25,27.71 51.56,27.4 51.56,27.38
  pour Route2: 42.98,0.36 42.98,58.88 71.17,58.88 71.17,0.36
+3V2  (via drill 0.3)
  Bottom 0.152: U$2.2 97.31,25.05 v97.32,25.04
  pour Route15: 99.31,-0.15 63.65,-0.15 63.65,44.81 99.31,44.81
+3V3  (via drill 0.3, 0.35)
  Top 0.152: 2.98,6.91 U6.197 | v12.5,69.09 12.5,68.99 12.04,68.53 | 12.04,68.53 10.81,68.53 U6.4 U6.6 | 12.04,68.53 13.2,68.53 | 13.2,68.53 C10.2 | 13.2,68.53 13.31,68.53 v15.65,70.87 | v19.51,40.79 20.17,41.35 20.17,43.54 v20.02,43.69 | v22.4,27.28 22.4,27.62 C12.2 | C10.2 12.87,67.98 v12.75,67.87 | v19.46,37.69 20.07,37.08 20.07,34.93 19.74,34.6 19.74,34.14 20.07,33.81 | U9.1 U9.5 26.33,23.68 26.32,23.68 26.32,23.67 25.7,23.67 25.51,23.48 C3.2 v22.76,23.48 | 20.07,33.81 v20.07,30.99 | 34.45,53.48 C20.2 | 34.45,53.48 v34.95,52.98 | C20.2 32.42,53.48 | 34.45,53.48 34.45,57.14 33.33,58.27 33.32,58.26 32.56,58.26 | 32.56,58.26 U10.19 30.74,58.26 v30.68,58.32 | U10.32 v25.65,64.76 23.99,64.76 22.91,65.84 U10.48 22.88,66.8 C21.2 21.07,67.61 20.27,67.61 19.9,67.98 C10.2 | C20.2 30.04,53.48 28.91,54.61 28.91,55.25 U10.13 28.96,55.3 28.96,55.93 28.65,56.24 22.91,56.24 | v13.26,33.27 19.53,33.27 20.07,33.81 | 20.52,13.46 20.52,10.62 20.33,10.43 R18.1 17.75,10.43 R17.1 | U6.41 2.87,53.91 2.87,56.91 2.56,57.23 2.54,57.23 2.54,57.56 U6.39 6.13,58 v6.71,58.57 7.58,57.7 U6.40 10.83,57.66 11.18,57.66 | U10.1 22.91,56.24 | 22.91,56.24 21.89,57.25 U10.64 20.86,57.2 20.07,57.2 18.9,58.37 v18.49,58.37 | 32.52,58.22 32.56,58.26 | v16.71,57.91 16.46,57.66 11.18,57.66 | v19.91,13.46 20.52,13.46 | 20.52,13.46 20.52,17.02 21.03,17.53 21.08,17.53 | 11.18,57.66 11.18,54.83 11.47,54.54 11.47,54.08 10.9,53.5 U6.42 12.69,53.5 v13.92,52.27
  Top 0.254: U6.199 2.98,6.91 | U6.191 U6.193 1.47,8.2 v1.47,8.18 | U6.200 U6.198 9.81,6.7 9.5,7.01 9.5,7.59 9.81,7.9 U6.194 U6.192 | 20.52,7.26 24.89,7.26 v25.04,7.42 | 20.52,7.26 v19.81,6.55 19.57,6.31 16.47,6.31 16.26,6.1 U6.200 | 20.52,7.26 20.52,10.62 20.52,16.97 21.08,17.53 21.13,17.58 v21.95,17.58 | v22.82,38.47 23.82,39.47 25.65,39.47 26.31,38.81 v26.92,38.81 | U6.199 v1.52,6.4 | U6.199 2.98,5.79 v2.95,5.79 | U6.200 10.78,4.78 v10.72,4.78 | U6.200 3.28,6.1 U6.199
  Bottom 0.152: 19.32,22.98 U5.16 | C19.2 8.89,71.98 10.11,70.76 11.04,70.76 U2.4 11.13,70.45 v12.5,69.09 | v15.65,70.87 14.89,70.87 U2.1 | v6.71,58.57 6.71,60.76 6.1,61.37 J8.4 | C13.2 19.87,38.7 U4.23 U4.22 | v19.51,40.79 19.51,39.74 20.15,39.1 C13.2 | C16.2 22.04,26.91 v22.4,27.28 21.79,27.89 U8.1 U8.5 19.96,27.89 19.56,28.3 19.56,30.48 v20.07,30.99 | v19.46,37.69 19.46,38.29 C13.2 | v12.7,65.68 12.7,67.82 v12.75,67.87 | v34.95,52.98 36.78,52.98 U11.VCC | J13.15 6.5,26.98 6.5,32.11 7.62,33.22 13.21,33.22 v13.26,33.27 | v16.71,57.91 16.92,57.91 17.22,58.22 18.34,58.22 v18.49,58.37 | R32.2 v19.91,13.46 | v20.02,43.69 20.02,44.27 19.12,45.16 18.9,45.16 17.49,46.57 16.87,46.57 16.66,46.78 16.66,50.8 15.19,52.27 v13.92,52.27 | v30.68,58.32 25.65,63.35 v25.65,64.76 | R15.1 1.69,35.36 v1.17,35.36 | R16.1 1.54,29.96 v1.42,30.07
  Bottom 0.254: 19.32,22.98 20.55,24.21 C16.2 v22.76,23.48 L2.P$2 24.29,20.75 24.29,19.65 23.3,18.67 23.04,18.67 v21.95,17.58 | v19.81,6.55 19.42,6.17 J14.15 | v25.04,7.42 26.27,7.42 J4.2 | U4.23 19.75,38.7 20.15,39.1 | J3.3 30.62,37.95 29.36,37.95 28.09,39.22 27.69,39.22 27.28,38.81 v26.92,38.81 | C13.2 20.21,38.77 21.06,37.92 22.34,37.92 22.82,38.4 v22.82,38.47
  pour Route15: 0.25,0.36 38.76,0.36 38.76,75.54 0.25,75.54
+3V4
  Top 0.152: 88.5,61.16 88.5,63.04 U$3.1 84.43,67.11 81.13,67.11 75.84,72.39 65.38,72.39 64.09,73.68 U$4.11 | 88.5,61.16 U$3.A | 88.5,61.16 77.42,61.16 U$3.1'
+5V  (via drill 0.3, 0.35)
  Top 0.152: C1.1 19.55,28.09 v18.03,28.09 16.52,28.09 R4.1 16.1,29.07 v16.1,29.72 | v14.54,30.28 14.29,30.53 14.29,30.83 13.46,31.66 R2.1
  Top 0.254: v22,28.7 21.22,27.93 C1.1 19.71,26.99 R1.1 17.11,23.25 v17.17,23.19
  Bottom 0.152: 21.69,32.59 U7.7 | 21.69,32.59 21.79,32.59 21.89,32.59 | 22.61,32.59 22.72,32.59 C11.2 | U3.1 17.54,28.59 v18.03,28.09 | U8.8 v22,28.7 22,28.91 22.45,29.36 22.45,29.85 21.91,30.4 21.91,32.38 21.69,32.59 | v14.54,30.28 15.01,30.28 15.27,30.02 15.8,30.02 v16.1,29.72 | 17.17,23.06 v17.17,23.19
  Bottom 0.254: U5.10 U5.11 U5.12 17.17,23.06 | v17.17,23.19 17.17,24.42 C8.2 17.16,24.41 15.21,24.41 14.17,23.37 14.17,20.17 14.83,19.51 14.83,17.48 15.34,16.97 19.3,16.97 19.56,16.71 21.13,16.71 22.33,15.52 27.15,15.52 28.35,14.33 | J4.1 27.27,6.39 28.45,7.57 28.45,14.22 28.35,14.33 | C11.2 22.76,32.92 22.96,33.12 22.96,35.92 23.42,36.38 23.42,36.9 23.67,37.15 23.67,38.66 22.62,39.71 22.62,39.88 21.64,40.86 21.64,42.32 22.71,43.38 JP2.2 | 22.61,32.59 21.89,32.59 U7.7 | v22,28.7 22,28.94 22.38,29.32 22.38,29.81 21.86,30.33 21.86,32.53 21.79,32.59 | J6.1 31.62,17.6 28.35,14.33
+5V1  (via drill 0.3)
  Top 0.152: J17.1 47.3,36.83 46.94,37.19 | 46.94,37.19 | 46.94,37.19 46.94,38.79 v46.41,39.32 | v46.13,46.43 47.75,48.06 C27.2 49.44,49.29 49.84,49.68 49.84,55.31 J16.1
  Bottom 0.152: v46.41,39.32 45.44,40.29 45.44,45.74 v46.13,46.43
C0_C_N  (via drill 0.3)
  Top 0.152: U6.144 9.76,22.9 9.63,23.04 | 9.63,23.04 9.6,23.06 | v8.61,19.86 8.38,19.91 8.38,20.45 arc90 7.92,20.91 7.01,20.91 arc-90 6.86,21.06 6.86,22.24 arc-90 7.01,22.39 7.09,22.39 arc90 7.55,22.85 7.55,23.93 arc-90 7.7,24.08 8.15,24.08 arc-90 8.31,23.93 8.31,22.85 arc90 8.76,22.39 8.89,22.39 9.54,23.04 9.63,23.04
  Bottom 0.152: v8.61,19.86 8.38,19.91 8.38,19.76 7.87,19.25 7.74,19.39 J13.8
C0_C_P  (via drill 0.3)
  Top 0.152: U6.142 9.73,23.5 9.6,23.37 9.44,23.37 8.76,22.7 arc-90 8.61,22.85 8.61,23.93 arc90 8.15,24.38 7.7,24.38 arc90 7.24,23.93 7.24,22.85 arc-90 7.09,22.7 7.01,22.7 arc90 6.55,22.24 6.55,21.06 arc90 7.01,20.6 7.92,20.6 arc-90 8.08,20.45 8.08,20.32 v7.85,20.32
  Bottom 0.152: v7.85,20.32 8.08,20.32 8.08,20.12 7.37,20.12 J13.9
C0_D0_N  (via drill 0.3)
  Top 0.152: v8.38,13.44 8.38,13.72 9.16,13.72 9.45,14.01 9.45,14.9 8.75,15.6 7.99,15.6 7.42,16.17 7.42,16.68 6.15,17.95 6.15,23.51 7.48,24.84 9.8,24.84 9.96,24.69 U6.138
  Bottom 0.152: J13.2 7.85,13.39 8.18,13.72 8.38,13.72 v8.38,13.44
C0_D0_P  (via drill 0.3)
  Top 0.152: v8.38,14.3 8.38,14.02 9.03,14.02 9.14,14.13 9.14,14.77 8.62,15.29 7.86,15.29 7.11,16.04 7.11,16.55 5.84,17.82 5.84,23.63 7.35,25.15 9.55,25.15 9.7,25.3 U6.136
  Bottom 0.152: J13.3 7.81,14.39 8.18,14.02 8.38,14.02 v8.38,14.3
C0_D1_N  (via drill 0.3)
  Top 0.152: v8.38,16.48 8.38,16.76 9.05,16.76 9.45,17.16 9.45,17.88 arc90 8.99,18.34 7.06,18.34 arc-90 6.91,18.49 6.91,18.62 arc-90 7.06,18.77 8.99,18.77 arc90 9.45,19.23 9.45,20.98 9.57,21.1 U6.150
  Bottom 0.152: J13.5 7.86,16.39 8.23,16.76 8.38,16.76 v8.38,16.48
C0_D1_P  (via drill 0.3)
  Top 0.152: v8.38,17.4 8.38,17.07 8.93,17.07 9.14,17.28 9.14,17.88 arc90 8.99,18.03 7.06,18.03 arc-90 6.6,18.49 6.6,18.62 arc-90 7.06,19.08 8.99,19.08 arc90 9.14,19.23 9.14,21.44 9.41,21.7 U6.148
  Bottom 0.152: J13.6 7.91,17.39 8.23,17.07 8.38,17.07 v8.38,17.4
C0_IO0  (via drill 0.3)
  Top 0.152: v12.45,58.9 U6.36 | v7.68,54.45 7.14,53.91 7.14,51.51 6.55,50.93 6.55,45.44 5.74,44.63 5.74,35.84 4.53,34.63 4.53,33.16 v4.57,33.12
  Bottom 0.152: J13.11 6.36,22.39 5.23,23.52 | v12.45,58.9 12.87,58.48 12.87,57.39 12.12,56.64 9.63,56.64 8.2,55.22 8.2,54.97 v7.68,54.45
  Bottom 0.178: v4.57,33.12 4.57,24.18 5.23,23.52
C0_IO1  (via drill 0.3)
  Top 0.152: v12.6,59.74 12.29,59.44 10.85,59.44 U6.34 | v8.28,53.9 8.28,53.84 7.44,53 7.44,51.39 6.86,50.8 6.86,45.31 6.04,44.5 6.04,35.71 5.03,34.7 5.03,33.53 v5.44,33.12
  Bottom 0.152: J13.12 6.18,23.39 4.89,24.68 4.89,32.58 v5.44,33.12 | v12.6,59.74 13.17,59.17 13.17,57.26 12.24,56.34 9.76,56.34 8.51,55.09 8.51,54.13 v8.28,53.9
C1_C_N  (via drill 0.3)
  Top 0.152: U6.149 3,21.39 4.01,21.39 4.12,21.49 4.61,21.49 5.08,21.02 5.08,17.21 6.25,16.04 6.25,13.45 7.92,11.77 7.92,10.25 8.48,9.7 v8.47,9.28
  Bottom 0.152: v8.47,9.28 8.48,9.7 8.88,9.3 11.01,9.3 12.65,7.66 12.65,6.49 J14.8
C1_C_P  (via drill 0.3)
  Top 0.152: U6.147 3.03,22.05 3.86,22.05 4.12,21.79 4.74,21.79 5.38,21.14 5.38,17.34 6.55,16.17 6.55,13.58 8.23,11.9 8.23,10.38 8.69,9.91 v8.9,10.12
  Bottom 0.152: v8.9,10.12 8.69,9.91 9,9.6 11.14,9.6 12.95,7.79 12.95,6.54 J14.9
C1_D0_N  (via drill 0.3)
  Top 0.152: v4.42,17.73 4.32,17.73 4.22,17.83 4.19,17.8 U6.161
  Bottom 0.152: v4.42,17.73 4.22,17.53 4.22,16.88 arc-90 4.06,16.72 3.45,16.72 arc90 3.3,16.57 3.3,16.5 arc90 3.45,16.35 4.06,16.35 arc-90 4.22,16.2 4.22,16.13 arc-90 4.06,15.97 3.76,15.97 arc90 3.3,15.52 3.3,15.45 arc90 3.76,14.99 4.06,14.99 arc-90 4.22,14.84 4.22,14.77 arc-90 4.06,14.62 3.76,14.62 arc90 3.3,14.16 3.3,14.09 arc90 3.76,13.63 4.06,13.63 arc-90 4.22,13.48 4.22,13.41 arc-90 4.06,13.26 3.76,13.26 arc90 3.3,12.8 3.3,12.73 arc90 3.76,12.28 4.06,12.28 arc-90 4.22,12.12 4.22,12.06 arc-90 4.06,11.9 3.76,11.9 arc90 3.3,11.45 3.3,11.38 arc90 3.76,10.92 4.06,10.92 arc-90 4.22,10.77 4.22,10.7 arc-90 4.06,10.55 3.76,10.55 arc90 3.3,10.09 3.3,10.02 arc90 3.76,9.56 4.06,9.56 arc-90 4.22,9.41 4.22,9.28 5.91,7.59 6.04,7.46 6.33,7.17 J14.2
C1_D0_P  (via drill 0.3)
  Top 0.152: v4.47,18.54 4.17,18.54 4.01,18.39 4,18.4 U6.159
  Bottom 0.152: v4.47,18.54 4.95,18.06 4.95,17.51 4.52,17.08 4.52,16.13 arc-90 4.06,15.67 3.79,15.67 arc90 3.64,15.52 3.64,15.45 arc90 3.79,15.3 4.06,15.3 arc-90 4.52,14.84 4.52,14.77 arc-90 4.06,14.31 3.76,14.31 arc90 3.61,14.16 3.61,14.09 arc90 3.76,13.94 4.06,13.94 arc-90 4.52,13.48 4.52,13.41 arc-90 4.06,12.96 3.76,12.96 arc90 3.61,12.8 3.61,12.73 arc90 3.76,12.58 4.06,12.58 arc-90 4.52,12.12 4.52,12.06 arc-90 4.06,11.6 3.76,11.6 arc90 3.61,11.45 3.61,11.38 arc90 3.76,11.22 4.06,11.22 arc-90 4.52,10.77 4.52,10.7 arc-90 4.06,10.24 3.76,10.24 arc90 3.61,10.09 3.61,10.02 arc90 3.76,9.87 4.06,9.87 arc-90 4.52,9.41 6.51,7.42 7.11,7.42 7.33,7.2 J14.3
C1_D1_N  (via drill 0.3)
  Top 0.152: v4.52,19.38 4.57,19.66 4.32,19.66 4.26,19.6 U6.155
  Bottom 0.152: v4.52,19.38 4.57,19.66 4.66,19.66 5.33,18.99 5.33,17.13 5.03,16.83 5.03,16.55 arc90 5.49,16.1 arc-90 5.64,15.95 5.64,15.78 arc-90 5.49,15.63 arc90 5.03,15.17 5.03,15 arc90 5.49,14.55 arc-90 5.64,14.39 5.64,14.23 arc-90 5.49,14.07 arc90 5.03,13.62 5.03,13.45 arc90 5.49,12.99 arc-90 5.64,12.84 5.64,12.68 arc-90 5.49,12.52 arc90 5.03,12.07 5.03,11.9 arc90 5.49,11.44 arc-90 5.64,11.29 5.64,11.12 arc-90 5.49,10.97 arc90 5.03,10.52 5.03,9.59 6.34,8.28 8.67,8.28 9.54,7.41 9.54,7.11 9.25,6.81 9.25,6.25 J14.5
C1_D1_P  (via drill 0.3)
  Top 0.152: v4.47,20.3 2.99,20.19 U6.153
  Bottom 0.152: v4.47,20.3 4.72,20.12 4.79,19.96 5.64,19.11 5.64,17.01 5.33,16.7 5.33,16.55 arc90 5.49,16.4 arc-90 5.94,15.95 5.94,15.78 arc-90 5.49,15.32 arc90 5.33,15.17 5.33,15 arc90 5.49,14.85 arc-90 5.94,14.39 5.94,14.23 arc-90 5.49,13.77 arc90 5.33,13.62 5.33,13.45 arc90 5.49,13.3 arc-90 5.94,12.84 5.94,12.68 arc-90 5.49,12.22 arc90 5.33,12.07 5.33,11.9 arc90 5.49,11.75 arc-90 5.94,11.29 5.94,11.12 arc-90 5.49,10.67 arc90 5.33,10.52 5.33,9.71 6.46,8.59 8.8,8.59 10.33,7.06 J14.6
C1_IO0  (via drill 0.3)
  Top 0.152: v7.29,32 v7.29,42.22 | v9.33,42.47 9.5,42.47 9.7,42.67 10.75,42.67 U6.78 | v12.39,14.12 12.39,13.56 14.62,11.34 14.62,9.32 15.29,8.64 v15.29,7.26
  Bottom 0.152: v7.29,32 7.29,30.85 8.7,29.44 9.32,29.44 12.19,26.57 12.19,17.17 12.39,16.97 v12.39,14.12 | v7.29,42.22 9.07,42.22 v9.33,42.47 | v15.29,7.26 15.33,7.23 J14.11
C1_IO1  (via drill 0.3)
  Top 0.152: v7.82,31.09 7.82,32.51 7.59,32.74 7.59,41.33 7.82,41.55 v7.82,43.08 | v9.5,43.28 9.52,43.3 U6.76 | v12.95,14.73 12.95,13.61 14.92,11.65 14.92,9.44 16.26,8.11 16.26,7.37 v16.31,7.32
  Bottom 0.152: v7.82,31.09 8.51,30.4 8.51,30.06 8.83,29.75 9.45,29.75 12.5,26.7 12.5,17.3 12.7,17.09 12.7,15.44 12.93,15.21 12.93,14.91 v12.95,14.73 | v7.82,43.08 8.03,43.28 v9.5,43.28 | v16.31,7.32 16.33,7.29 J14.12
GND  (via drill 0.3, 0.35)
  Top 0.152: 11.77,58.3 U6.38 9.87,58.3 9.4,58.78 v9.4,60.1 | v18.95,30.63 18.95,30.34 C1.2 | U9.4 26.52,24.43 v26.16,24.79 | U6.79 4.28,42.4 v4.37,42.32 | U6.25 1.9,62.2 1.73,62.03 1.73,60.71 | 1.73,60.71 2.08,60.35 2.93,60.35 U6.31 | 1.73,60.71 1.73,58.78 1.93,58.57 2.95,58.57 U6.37 | 11.75,43.9 U6.74 10.85,43.84 11.84,43.84 12.09,43.59 12.09,42.37 | 12.09,47.19 11.79,47.5 U6.62 | 12.09,47.19 12.09,48.97 | 12.09,48.97 11.73,49.33 10.81,49.33 U6.56 | 2.94,51.36 U6.49 2.06,51.41 1.75,51.71 1.75,52.87 1.98,53.1 1.98,53.24 2.02,53.2 U6.43 | U6.170 9.69,15.1 9.25,15.54 v9.25,16.05 9.37,16.17 9.37,16.64 9.62,16.9 U6.164 | 12.09,42.37 11.84,42.11 10.79,42.11 U6.80 | 12.09,42.37 12.09,40.54 11.84,40.28 10.8,40.28 U6.86 9.67,40.3 9.55,40.19 9.55,38.76 9.8,38.51 U6.92 | U6.98 12.02,36.7 12.24,36.47 12.24,35.1 v12.65,34.7 | 12.09,48.97 12.09,50.9 11.89,51.1 U6.50 | U6.7 3.88,67.6 4.21,67.93 4.21,68.02 4.42,68.22 5.13,68.22 5.48,67.88 5.48,67.4 v5.33,66.95 5.05,66.83 5.05,66.28 4.58,65.8 U6.13 | 12.09,47.19 12.01,47.12 12.01,46.03 11.79,45.81 11.79,45.67 10.82,45.67 U6.68 10.75,45.67 9.6,45.67 9.42,45.49 9.42,45.14 9.3,45.01 v9.3,44.15 | U6.61 4.37,47.8 4.52,47.95 v4.52,49.58 | U10.12 28.42,54.64 28.6,54.46 28.6,54 v28.75,53.85 | 12.13,63.7 12.13,64.04 12.24,64.15 12.24,65.23 11.97,65.5 U6.14 10.98,65.7 11.88,65.7 12.01,65.83 12.01,66.97 11.99,67 11.99,67.31 10.79,67.31 U6.8 | 12.13,63.7 12.13,63.58 12.24,63.46 v12.24,62.89 | U6.20 12.13,63.7 | U6.73 1.93,44.2 1.93,44.36 1.75,44.53 1.75,45.9 1.68,45.97 2.96,45.97 U6.67 | U6.195 1.76,7.6 v1.47,7.32
  Bottom 0.152: U7.8 20.33,32.09 20.22,32.21 U7.EP 20.47,33.09 U7.6 21.61,33.09 v22.3,33.78 | U5.6 18.82,21.16 | U5.3 18.82,21.16 | 18.82,21.16 U5.17 18.32,21.66 U5.14 U5.15 18.82,24.37 C8.1 | C4.1 3.96,48.77 4.62,49.43 5.84,49.43 U4.10 5.9,49.43 6.86,49.43 7.01,49.58 7.01,51.16 6.57,51.6 U4.12 | J8.6 5.99,59.17 v6.1,59.28 | U8.4 19.98,27.44 19.25,28.17 19.25,30.33 v18.95,30.63 | v4.37,42.32 4.74,42.79 4.74,43.59 4.87,43.73 5.4,43.73 U4.7 | 19.46,19.05 19.3,19.2 19.3,20 U5.5 | U3.2 16.89,27.53 17.58,27.53 17.68,27.43 17.78,27.43 18.04,27.18 18.26,27.18 19.48,25.96 v19.61,25.96 | J8.10 4.19,54.66 4.04,54.81 1.78,54.81 v1.42,55.17 | J5.P$1 2.95,51.41 v1.78,51.41 | v6.71,67.06 6.29,67.06 5.15,68.2 4.45,68.2 4.32,68.33 4.37,68.38 v4.37,70.31 | J14.7 11.33,5.08 v11.94,4.47 11.53,4.06 9.09,4.06 8.33,4.83 J14.4 | J14.1 4.45,5.28 v4.17,5.28 | J13.1 8.68,12.39 9.4,13.11 9.4,15.9 v9.25,16.05
  other vias: 29.06,31.9 23.06,19.25 7.21,61.52 16.36,73.91 16.31,23.37 13.72,7.67 13.97,24.64 15.7,37.54 9.3,65.33 15.29,58.67 5.64,65.58 27.13,20.32 19.81,46.43 29.36,37.19 31.75,55.98 18.69,36.73 14.99,34.65 20.98,40.64 21.44,35.97 16.51,56.49 16.21,66.5 4.57,7.47 12.24,12.9 22.2,14.43 27.79,11.38
  pour Top (rank 2): 0.61,75.18 38.76,75.54 38.96,0.2 0.61,0.15
  pour Bottom (rank 2): 0.66,75.23 38.86,75.49 38.96,0.15 0.66,0.1
  pour Route2: 0.25,75.59 38.91,75.59 38.91,0.2 0.25,0.2
GND1  (via drill 0.3)
  Top 0.152: C31.1 50.11,38.08 50.11,38.06 50.24,37.93 v50.24,37.59 | U1.11 49.68,26.26 C43.1 | C28.2 45.29,26.29 45.31,26.29 45.33,26.26 U1.20 46.21,26.26 46.47,26.52 46.47,26.8 46.44,26.83 U1.18 46.51,27.28 46.51,27.6 46.71,27.79 47.09,27.79 v47.55,28.25 | C14.1 48.98,31.65 v49.73,31.65
  Bottom 0.152: U12.65 48.99,35.85 U12.44 | U12.65 47.49,30.85 U12.34 v45.48,30.85 v45.47,30.84 | U12.65 50.74,32.66 v49.73,31.65 | C32.1 v46.43,42.01 | v56.19,40.54 56.15,40.5 R19.2 | v58.62,42.82 58.89,42.56 C23.1 | C22.1 57.35,46.8 v57.35,46.89 | C36.1 v51.51,28.3 | C44.1 v57.2,33.63 | C33.1 47.95,42.6 48.06,42.7 48.06,43.59 R21.1 v47.5,45.62
  other vias: 43.84,30.73 43.84,24.03 46.33,45.31 44.25,1.73 52.22,8.03 53.04,30.89 45.31,28.3 51.05,31.7 46.02,42.98 43.84,45.67 62.48,39.83 59.44,48.97 55.42,23.32 48.06,35.86
  pour Top: 42.88,-2.2 42.88,58.8 71.24,58.8 71.24,-2.2
  pour Bottom: 42.88,-2.2 42.88,58.8 71.24,58.8 71.24,-2.2
  pour Route15: 42.93,0.36 71.22,0.36 71.22,58.88 42.93,58.88
GND2  (via drill 0.3)
  Top 0.152: C51.1 v87.38,35.51 | C53.1 v80.92,35.51 | v83.36,35.56 83.76,35.56 C52.1 | v80.26,34.65 79.9,35.01 C49.1 | v77.32,33.33 77.69,32.96 C50.1 | v94.18,21.44 94.2,21.45 U$2.14 | v94.18,19.05 v94.19,19.05 U$2.11 | v94.18,23.57 94.47,23.85 U$2.17
  other vias: 90.37,27.13 80.01,17.22
  pour Top: 98.15,-4.62 63.14,-4.47 63.14,45.06 98.15,44.91
  pour Bottom: 98.2,-4.93 61.16,-4.32 61.16,45.21 98.2,44.6
  pour Route2: 98.96,-0.15 63.7,-0.15 63.7,44.2 98.96,44.2
GND3  (via drill 0.35)
  other vias: 70.61,69.55 66.9,69.19
  pour Bottom (rank 3): 91.97,34.77 59.54,34.82 59.54,84.35 91.97,84.3
  pour Top (rank 3): 91.41,34.95 59.54,34.87 59.54,84.4 91.41,84.48
GPCLK  (via drill 0.3)
  Top 0.152: 51.09,41.66 | 51.09,41.66 50.04,41.66 49.48,42.22 49.48,44.25 48.89,44.83 J17.9 | 51.09,41.66 52.04,41.66 52.75,40.95 v52.75,40.82
  Bottom 0.152: U12.61 52.99,39.06 52.76,39.3 52.76,40.33 52.75,40.34 v52.75,40.82
GPCLK1  (via drill 0.3, 0.35)
  Top 0.152: U6.82 9.55,41.5 v9.4,41.35 | v12.55,33.88 12.63,33.8 12.63,26.9 14.53,25 14.53,23.42 v19.86,18.09 | v23.62,16.13 24.49,15.26 v24.49,14.58
  Bottom 0.152: v9.4,41.35 11.48,41.35 15.16,37.67 15.16,35.64 14.15,34.62 13.39,34.62 12.66,33.88 v12.55,33.88 | v19.86,18.09 20.88,17.07 21.28,17.07 22.25,16.1 23.6,16.1 v23.62,16.13 | J4.9 24.67,14.39 v24.49,14.58 23.92,14.01 R10.1
I2C_MPU_SCL  (via drill 0.3, 0.35)
  Top 0.152: U9.3 26.92,24.74 26.72,24.95 26.72,25.02 25.4,26.34 25.4,29.41 24.79,30.02 v24.79,32.16 | v27.43,53.49 29.01,51.92 30.58,51.92 31.14,51.36 31.14,48.41 30.48,47.75 26.9,47.75 v25.79,46.65 | v22.2,58.67 22.11,58.76 U10.61
  Bottom 0.152: v24.79,32.16 25.04,32.41 25.04,37.21 26.06,38.23 26.06,45.97 25.79,46.24 v25.79,46.65 | v27.43,53.49 22.25,58.67 v22.2,58.67
I2C_MPU_SDA  (via drill 0.3, 0.35)
  Top 0.152: U9.2 27.26,24.23 27.26,24.91 25.7,26.46 25.7,29.54 25.09,30.15 25.09,31.71 25.32,31.93 25.32,32.49 v25.7,32.87 | v27.94,54.2 28.14,54 28.14,53.21 29.13,52.22 30.71,52.22 31.45,51.48 31.45,48.29 30.61,47.45 27.94,47.45 27.23,46.74 v26.67,46.74 | U10.62 21.86,58.26 21.98,58.14 23.55,58.14 v23.57,58.12
  Bottom 0.152: v25.7,32.87 25.7,33.12 25.35,33.48 25.35,37.08 26.36,38.1 26.36,46.43 v26.67,46.74 | v27.94,54.2 24.03,58.12 v23.57,58.12
I2C_SCL  (via drill 0.3, 0.35)
  Top 0.152: U6.11 4.42,66.4 v4.52,66.5 | v4.16,57.3 5.28,57.3 5.3,57.32 7.4,57.32 9.38,55.35 10.09,55.35 v10.41,55.17
  Bottom 0.152: U8.3 20.98,27.08 20.83,26.93 20.07,26.93 18.95,28.04 18.95,29.11 17.32,30.73 15.44,30.73 14.73,31.45 14.73,33.68 15.16,34.11 15.21,34.11 15.52,34.42 15.52,34.47 16.73,35.68 16.73,42.79 16.97,43.03 17.8,43.03 U4.19 18.72,43.1 19.3,43.69 19.3,44.55 19,44.86 17.63,44.86 16.07,46.42 | v4.16,57.3 3.3,57.3 1.58,59.02 1.58,66.07 1.87,66.36 4.41,66.36 4.41,66.38 v4.52,66.5 | v10.41,55.17 10.41,54.66 10.31,54.56 10.31,53.91 13.32,50.9 15.14,50.9 16.26,49.78 16.26,49.07 15.7,48.51 15.7,46.79 16.07,46.42 | 16.07,46.42
I2C_SCL_1V8  (via drill 0.3, 0.35)
  Top 0.152: U9.6 26.52,22.6 26.78,22.34 | 26.78,22.34 28.28,22.34 v28.75,22.81 | 26.78,22.34 26.56,22.34 26.21,22 26.21,19.56 27.13,18.64 27.13,16.89 v27.2,16.82 | v28.35,15.65 28.35,13.21 v27.53,12.39
  Bottom 0.152: v28.75,22.81 28.75,23.65 28.65,23.75 28.65,24.21 28.75,24.31 28.75,27.21 28.61,27.35 28.61,28.22 29.23,28.84 31.33,28.84 | v27.2,16.82 27.2,16.79 v28.35,15.65 | v27.53,12.39 J4.7
I2C_SCL_5V  (via drill 0.3, 0.35)
  Top 0.152: v21.18,30.38 22.1,30.38 23.22,31.5 23.22,32.31 25.35,34.44 30.48,34.44 30.94,34.9 v31.55,34.9 31.55,34.95 | 31.55,34.95 31.55,40.03 v32.11,40.59 32.11,45.52 v32.31,45.72 | v33.38,31.65 33.38,33.12 31.55,34.95